# Altium PCB prism_mainboard.PcbDoc
Units mm, origin at the board's own origin, x right, y up, seen from the top; angles counter-clockwise.
Board outline 152.4 x 101.6 mm, 22 copper layers (F.Cu, F.Mask, B.Cu, B.Mask, In1.Cu, F.SilkS, In2.Cu, B.SilkS, In3.Cu, F.Adhes, In4.Cu, B.Adhes, F.Paste, B.Paste, Dwgs.User, Cmts.User, Eco1.User, Eco2.User, Edge.Cuts, Margin, B.CrtYd, F.CrtYd); 76 components, 0 nets, 1138 pads, 0 vias.
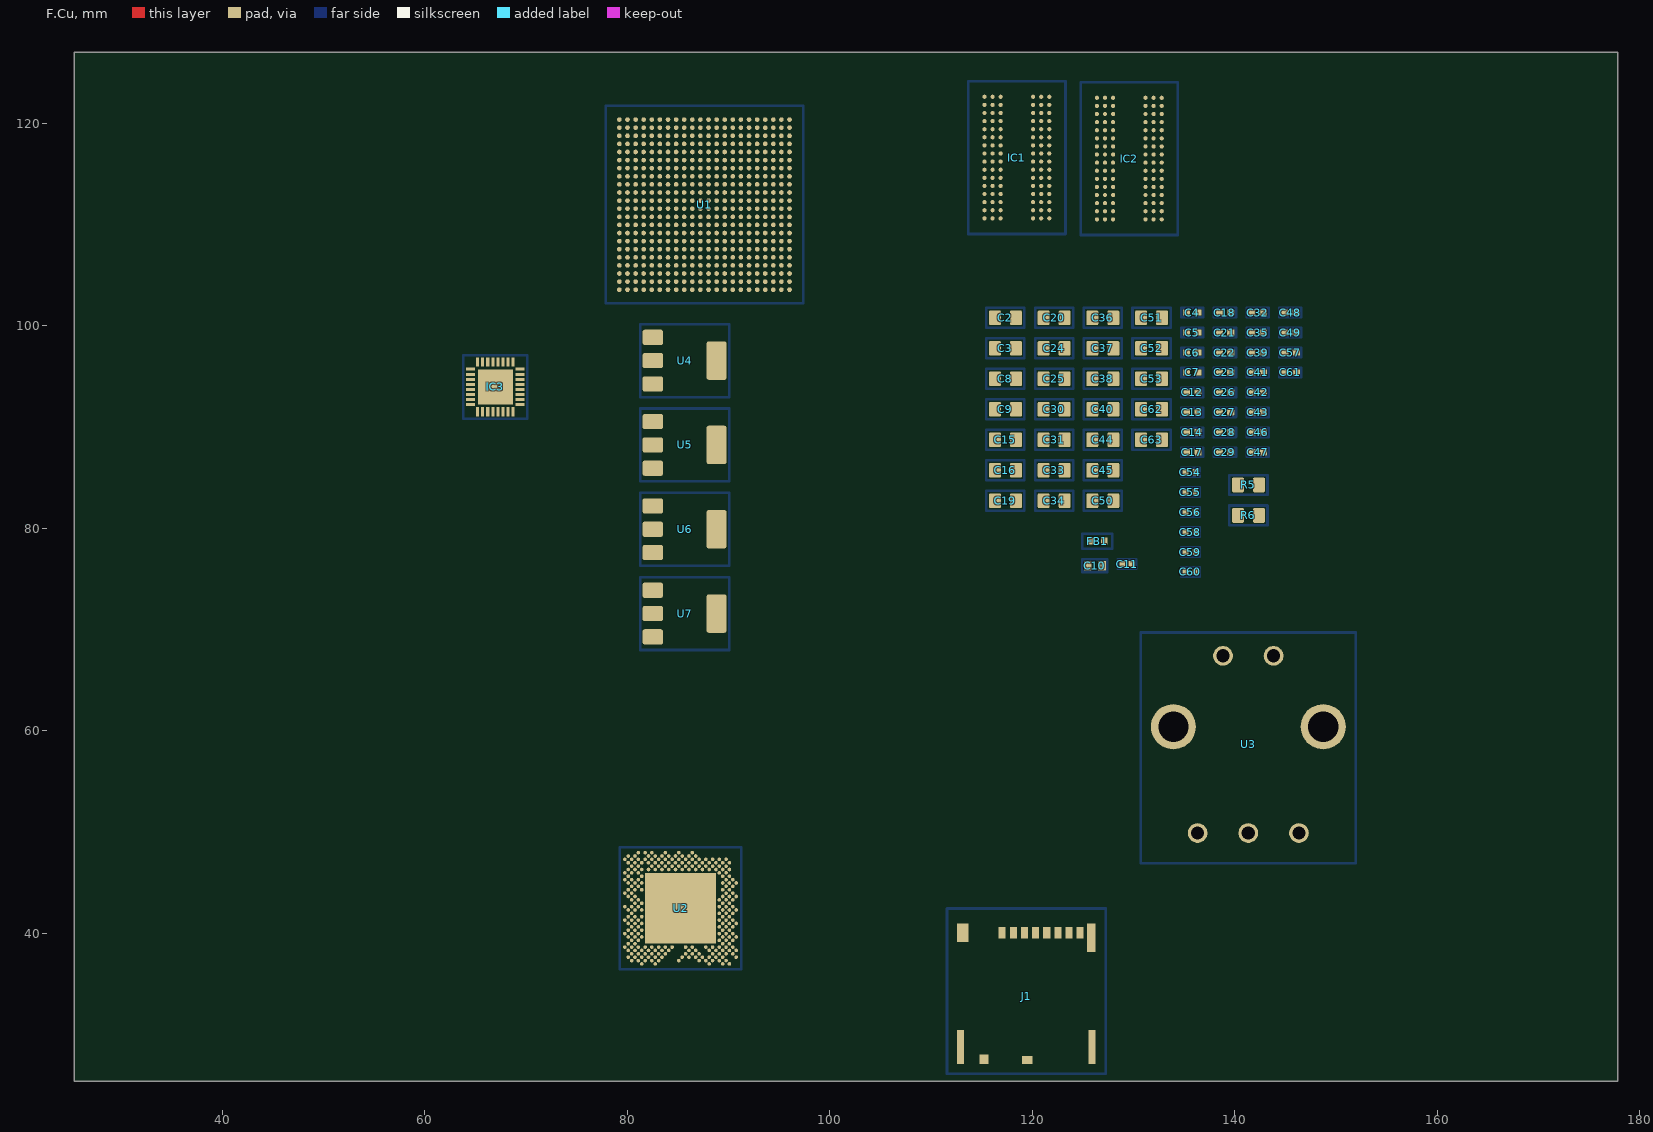
[diagram p0: F.Cu view]
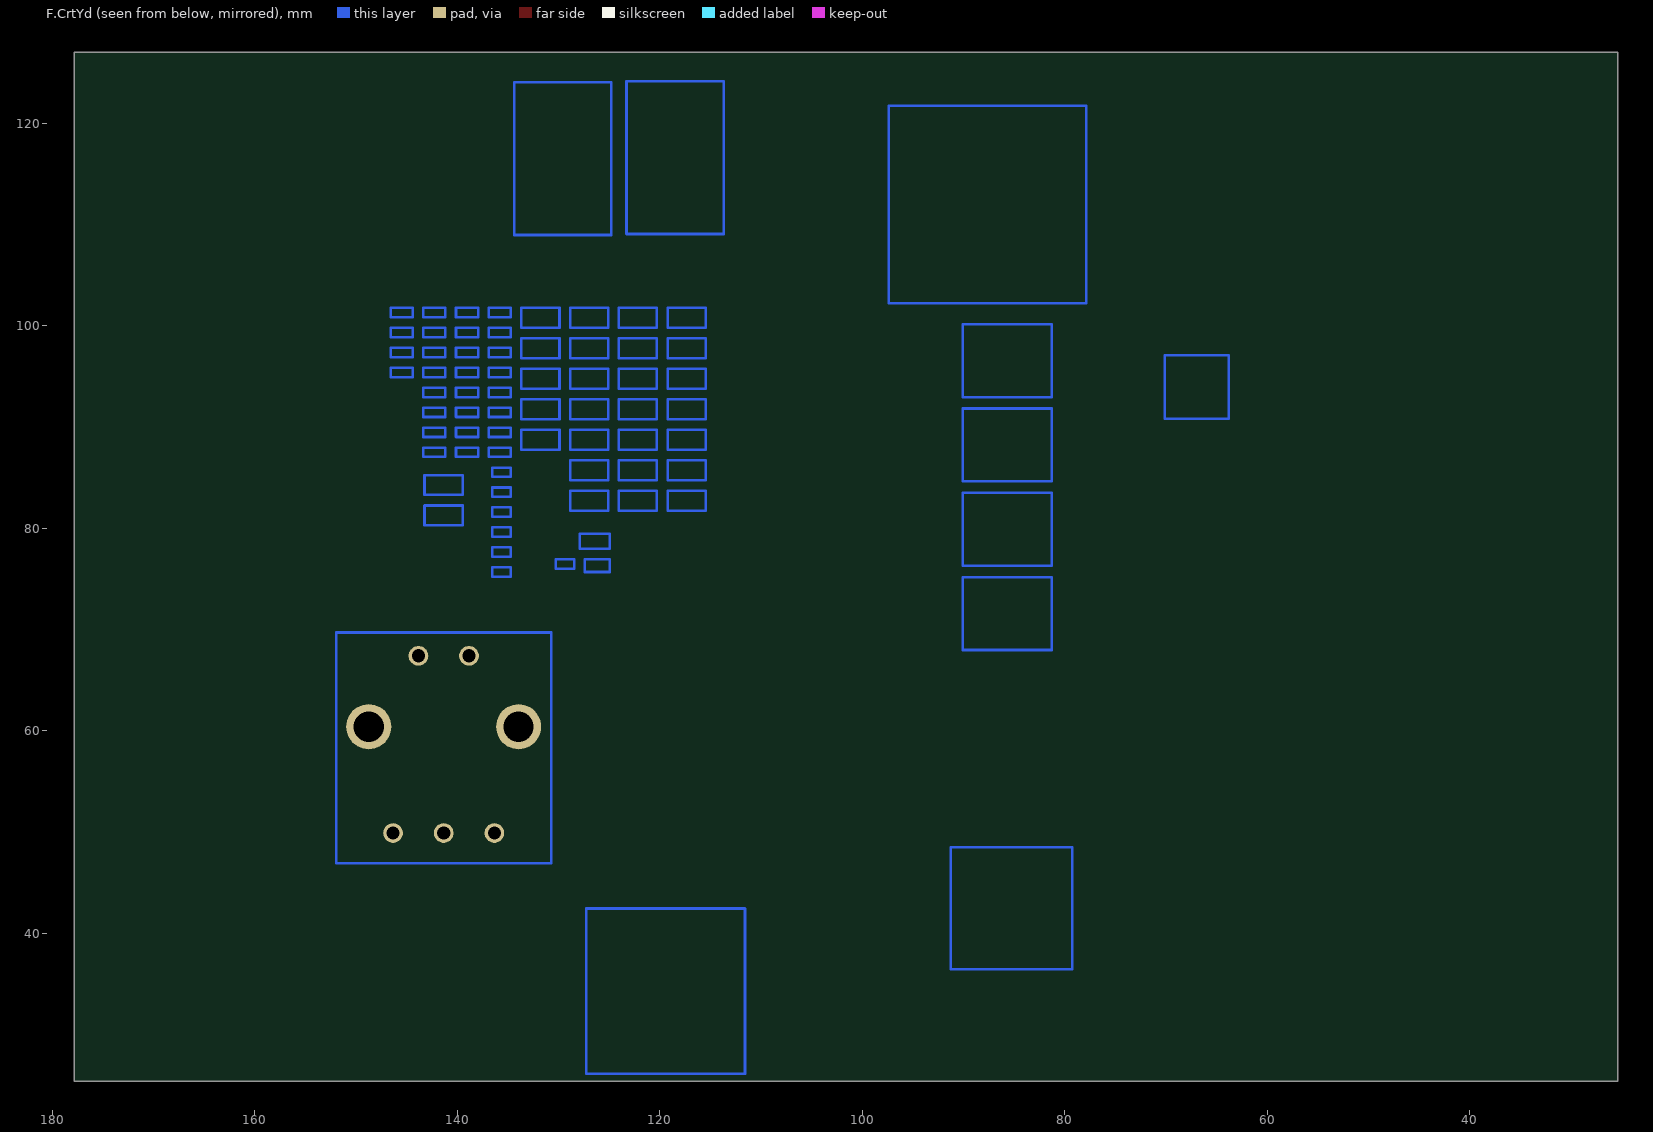
[diagram p1: F.CrtYd view, seen from below]
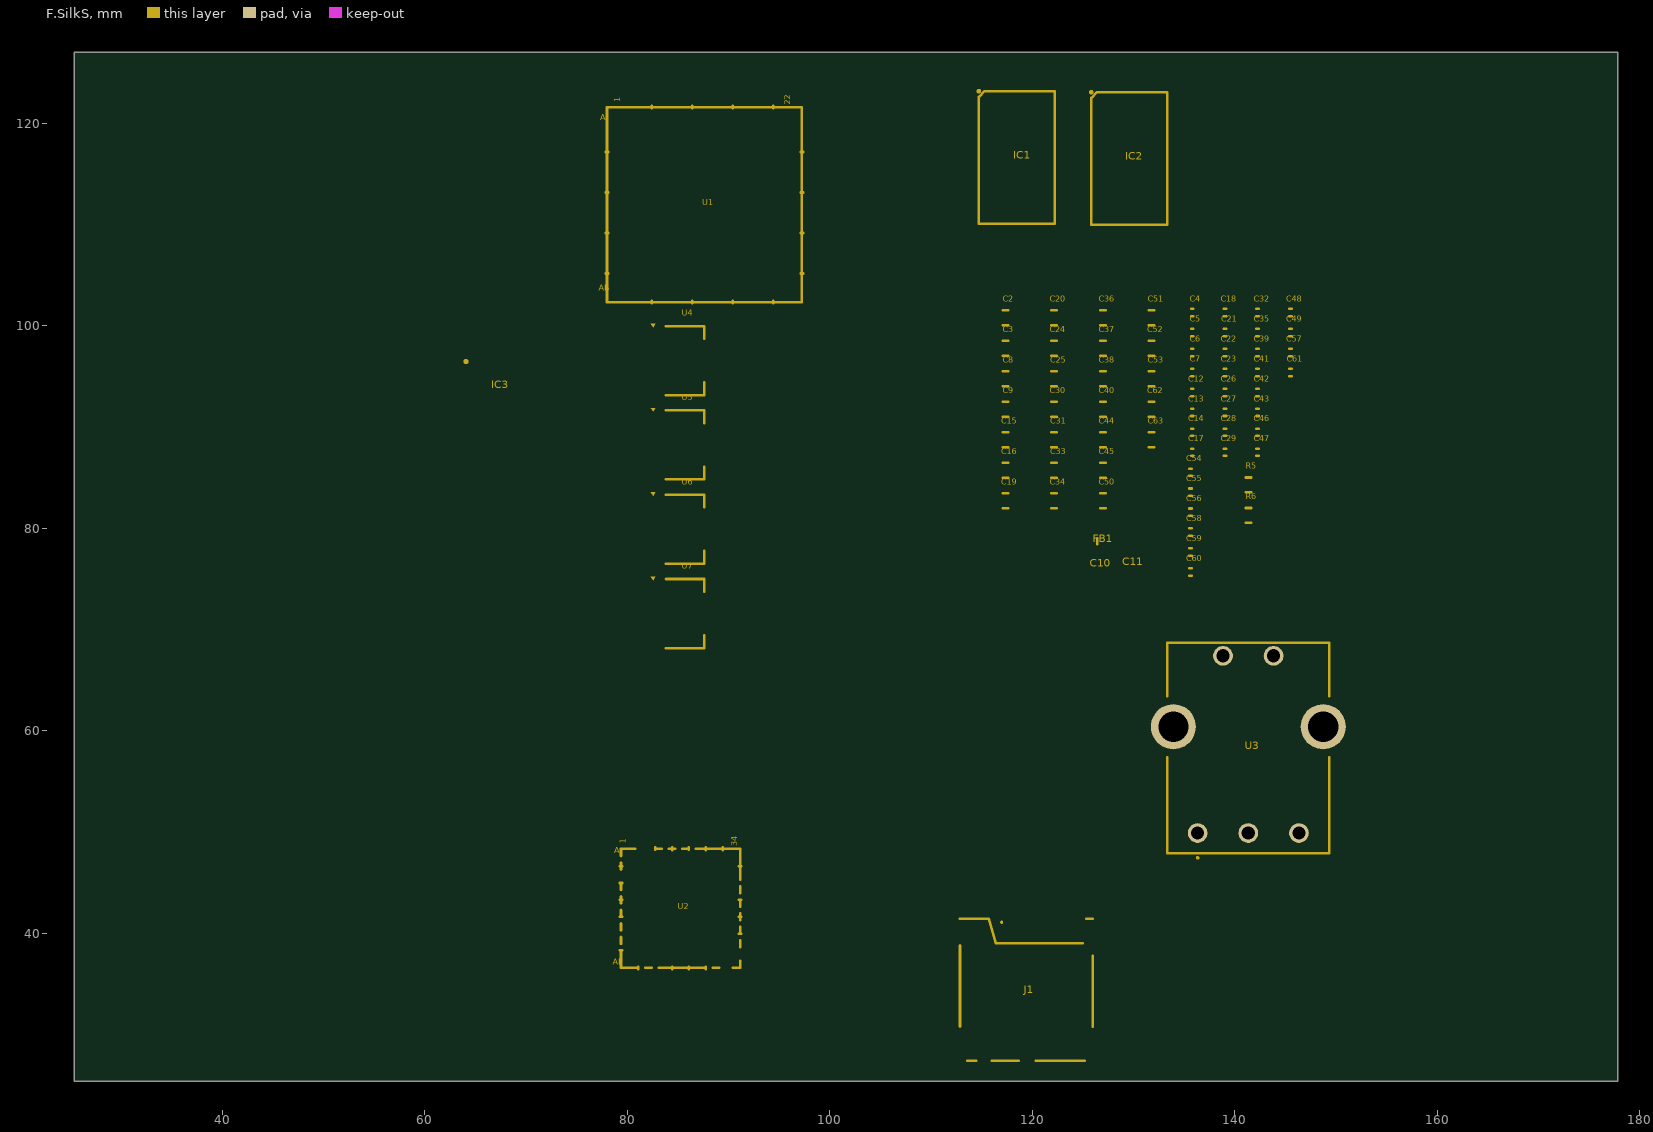
[diagram p2: F.SilkS]
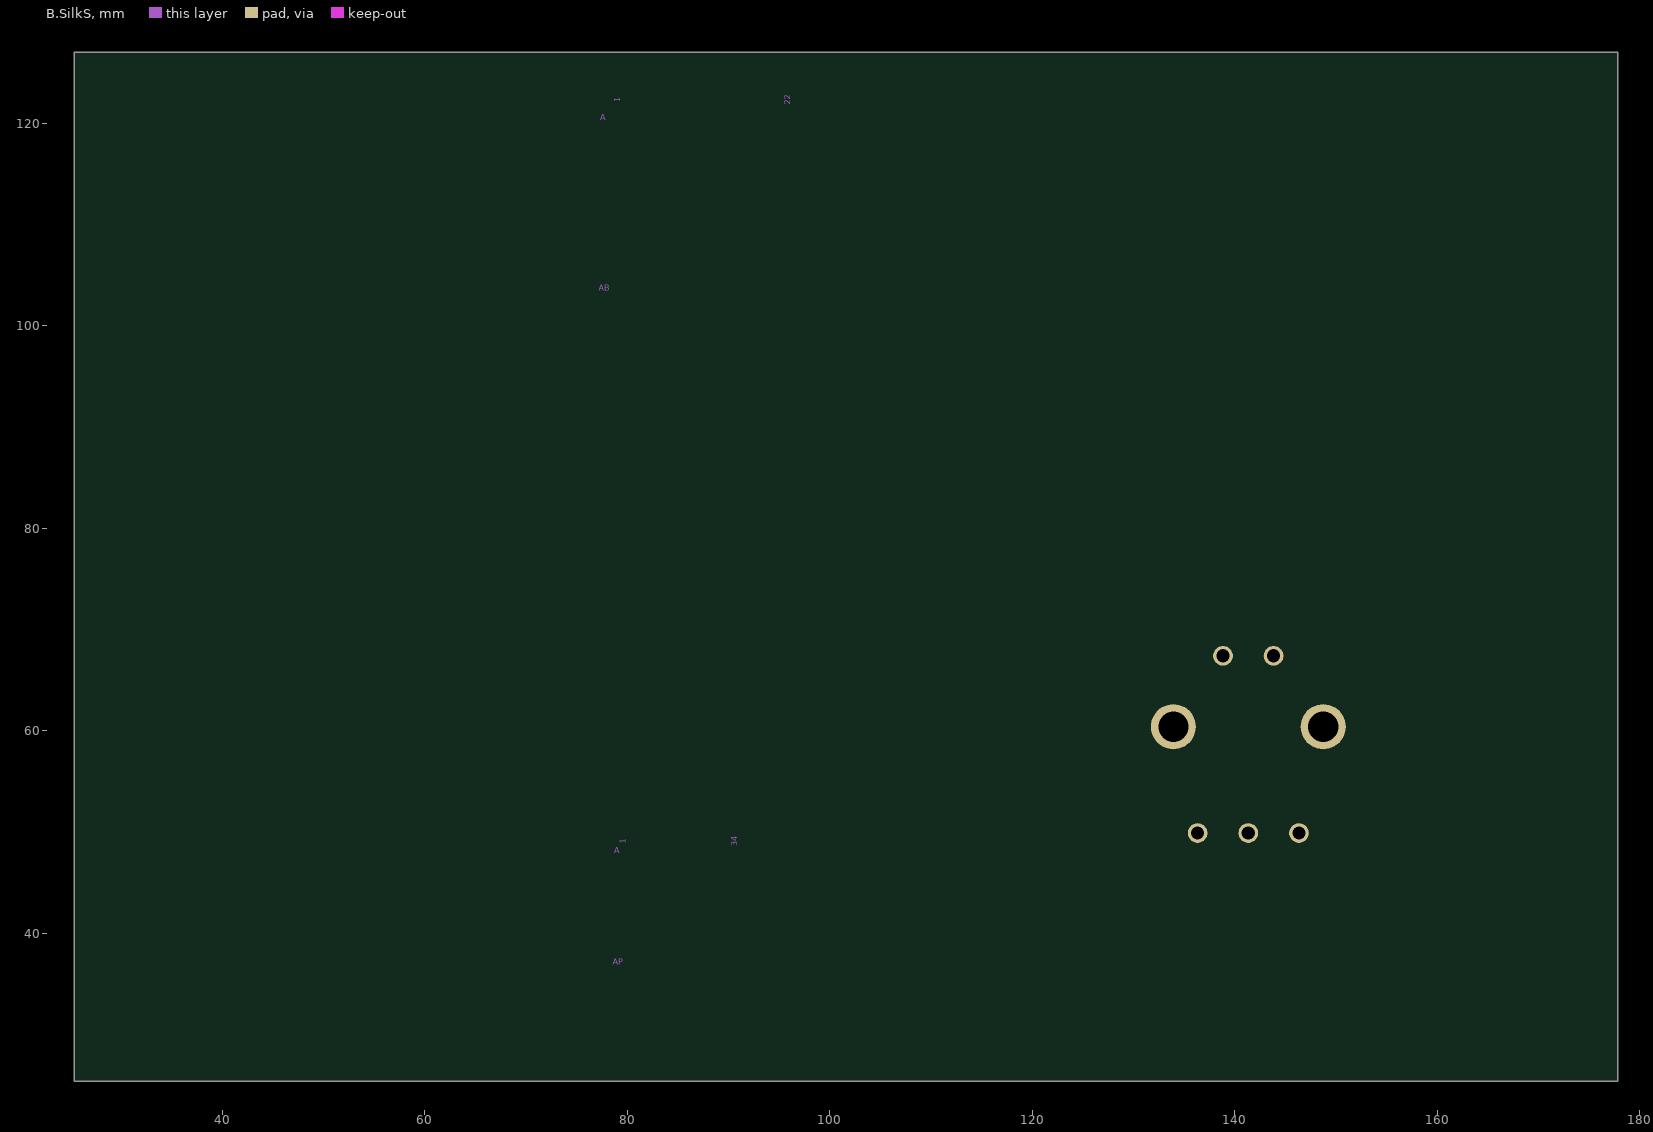
[diagram p3: B.SilkS]
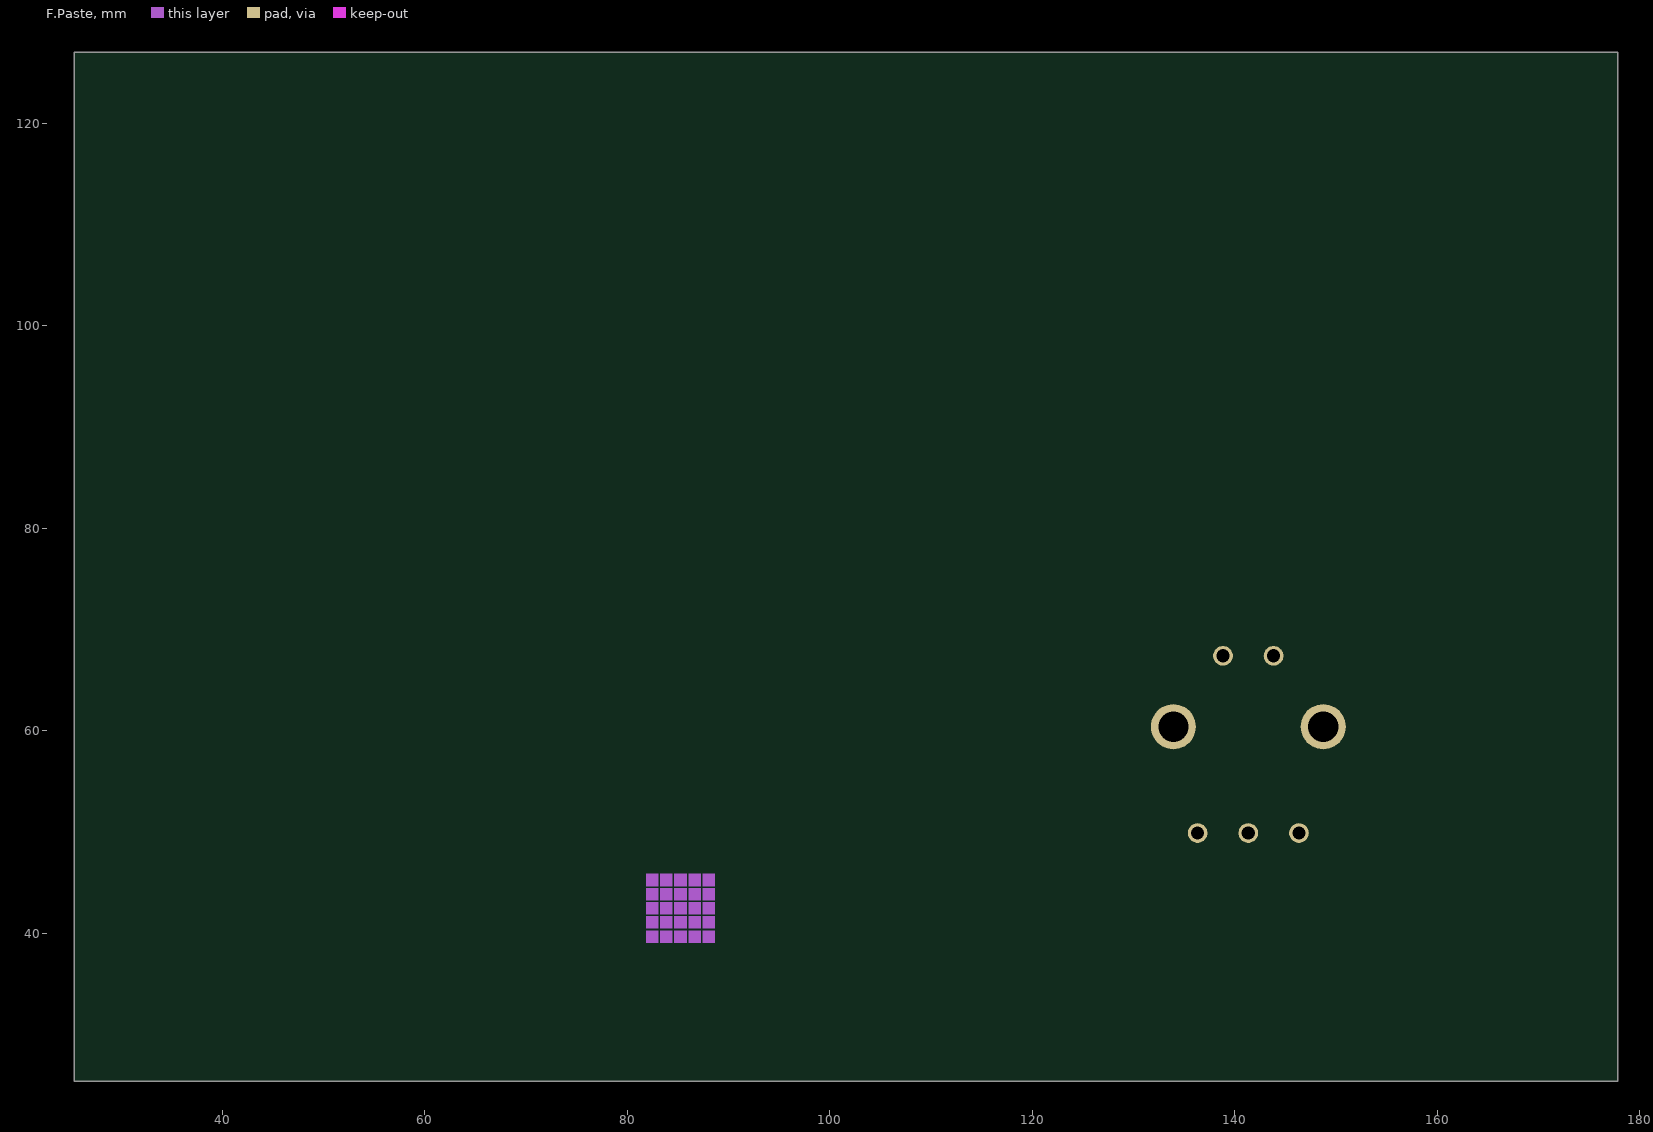
[diagram p4: F.Paste]
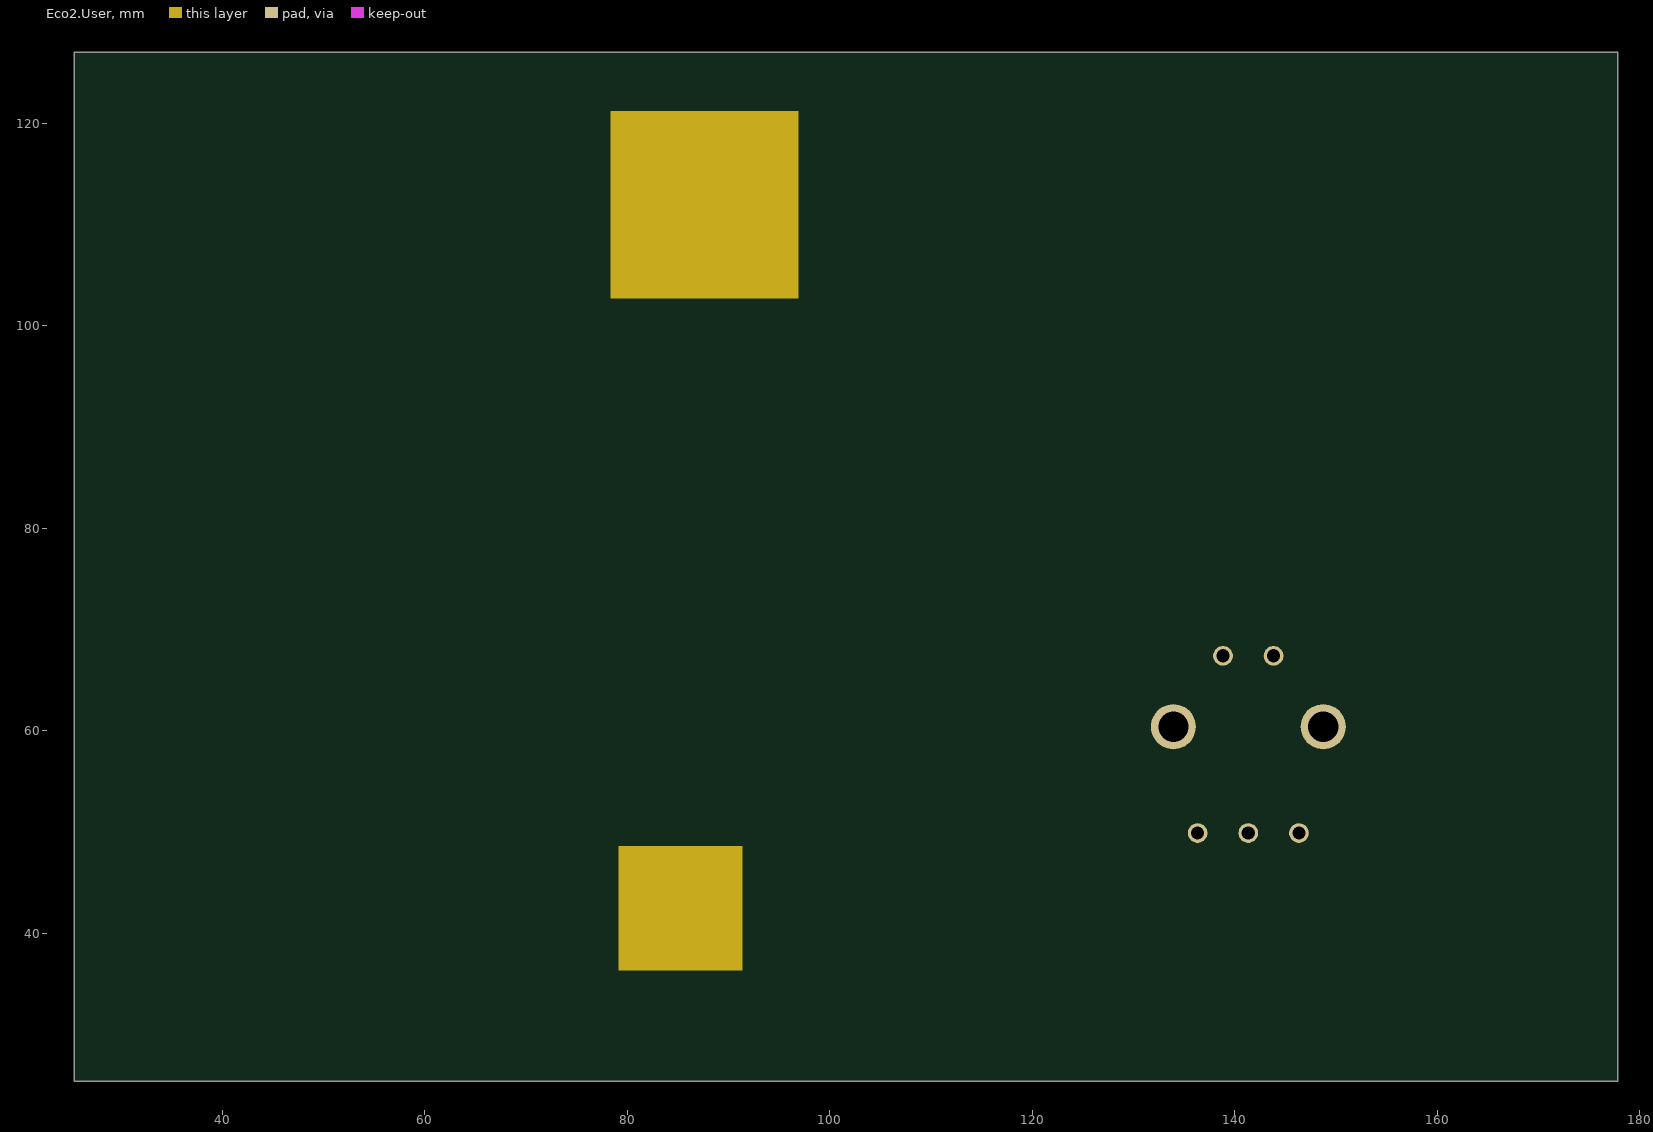
[diagram p5: Eco2.User]
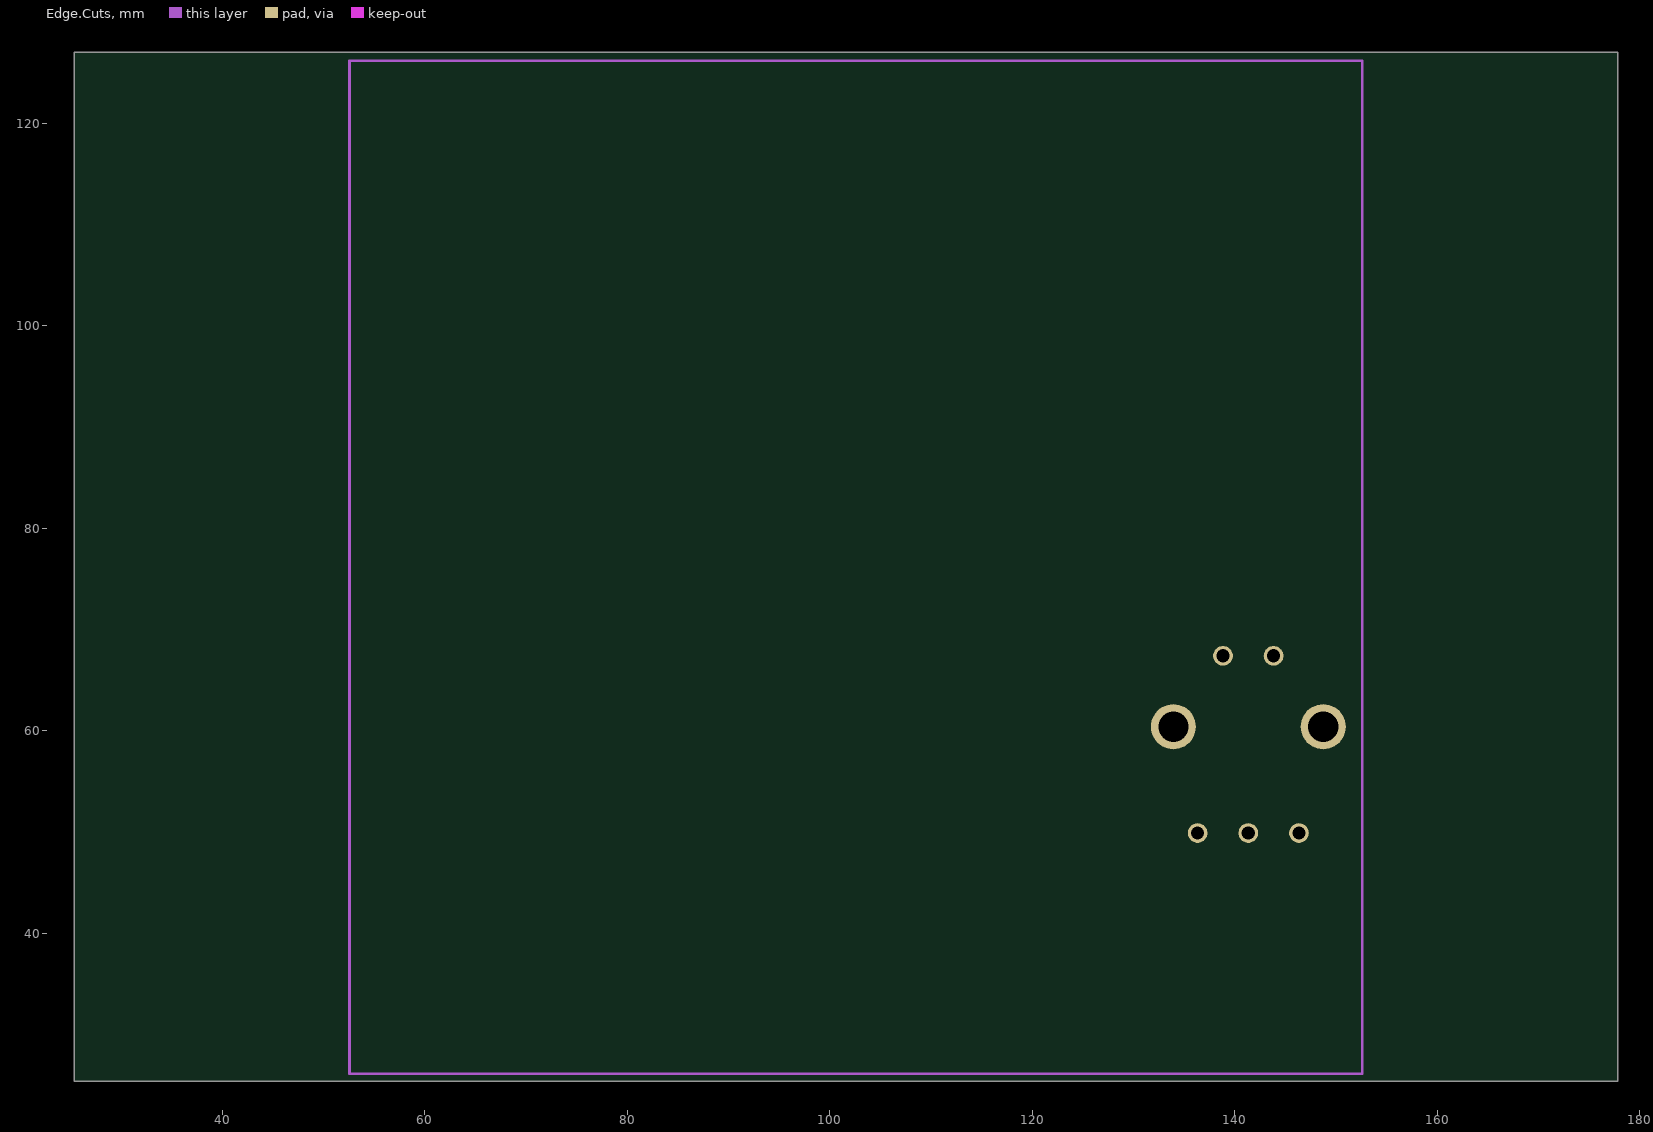
[diagram p6: Edge.Cuts]

## Layer stack, top to bottom
Top Solder: solder mask 0.0102, Solder Resist, Dk 3.5
F.Cu: signal copper 0.0356
Dielectric 1: dielectric 0.32, FR-4, Dk 4.8
F.Mask: signal copper 0.0356
Dielectric2: dielectric 0.32, FR-4, Dk 4.8
B.Cu: signal copper 0.0356
Dielectric3: dielectric 0.32, FR-4, Dk 4.8
B.Mask: signal copper 0.0356
Dielectric4: dielectric 0.32, FR-4, Dk 4.8
In1.Cu: signal copper 0.0356
Dielectric5: dielectric 0.32, FR-4, Dk 4.8
F.SilkS: signal copper 0.0356
Dielectric6: dielectric 0.32, FR-4, Dk 4.8
In2.Cu: signal copper 0.0356
Dielectric7: dielectric 0.32, FR-4, Dk 4.8
B.SilkS: signal copper 0.0356
Dielectric8: dielectric 0.32, FR-4, Dk 4.8
In3.Cu: signal copper 0.0356
Dielectric9: dielectric 0.32, FR-4, Dk 4.8
F.Adhes: signal copper 0.0356
Dielectric10: dielectric 0.32, FR-4, Dk 4.8
In4.Cu: signal copper 0.0356
Dielectric11: dielectric 0.32, FR-4, Dk 4.8
B.Adhes: signal copper 0.0356
Dielectric12: dielectric 0.32, FR-4, Dk 4.8
F.Paste: signal copper 0.0356
Dielectric13: dielectric 0.32, FR-4, Dk 4.8
B.Paste: signal copper 0.0356
Dielectric14: dielectric 0.32, FR-4, Dk 4.8
Dwgs.User: signal copper 0.0356
Dielectric15: dielectric 0.32, FR-4, Dk 4.8
Cmts.User: signal copper 0.0356
Dielectric16: dielectric 0.32, FR-4, Dk 4.8
Eco1.User: signal copper 0.0356
Dielectric17: dielectric 0.32, FR-4, Dk 4.8
Eco2.User: signal copper 0.0356
Dielectric18: dielectric 0.32, FR-4, Dk 4.8
Edge.Cuts: signal copper 0.0356
Dielectric19: dielectric 0.32, FR-4, Dk 4.8
Margin: signal copper 0.0356
Dielectric20: dielectric 0.32, FR-4, Dk 4.8
B.CrtYd: signal copper 0.0356
Dielectric21: dielectric 0.32, FR-4, Dk 4.8
F.CrtYd: signal copper 0.0356
Bottom Solder: solder mask 0.0102, Solder Resist, Dk 3.5

## Board outline
25.4,25.4 177.8,25.4 177.8,127 25.4,127

## Design rules (kind name [scope] priority, off if disabled: settings)
Clearance "Clearence 0.2_NetClass" [InNetClass('Default')] p1: gap=0.2 ignorepadtopadclearanceinfootprint=FALSE
MinimumSolderMaskSliver [All] p1: minsoldermaskwidth=0
PolygonConnect [All] p1: connectstyle=Direct reliefconductorwidth=0.254 reliefentries=4 polygonreliefangle="90 Angle" airgapwidth=0.254
RoutingVias [All] p1: holewidth=0.711 width=1.27 viastyle="Through Hole" minholewidth=0.711 minwidth=1.27 maxholewidth=0.711 maxwidth=1.27
SilkToSilkClearance [All] p1: silktosilkclearance=0
SilkToSolderMaskClearance [IsPad] p1: minsilkscreentomaskgap=0 clearancetoexposedcopper=TRUE
SolderMaskExpansion [All] p1: expansion=0 istentingtop=FALSE
Width [All] p1: maxlimit=10 minlimit=0.254 preferedwidth=0.254 toplayer_maxwidth=0.254 midlayer1_maxwidth=0.254 midlayer2_maxwidth=0.254 midlayer3_maxwidth=0.254 midlayer4_maxwidth=0.254 midlayer5_prefwidth=0.2 midlayer6_maxwidth=0.254 midlayer7_prefwidth=0.2 midlayer8_maxwidth=0.254 midlayer9_maxwidth=0.254 midlayer10_maxwidth=0.254 midlayer11_maxwidth=0.254 midlayer13_prefwidth=0.2 midlayer15_maxwidth=0.254 midlayer17_maxwidth=0.254 midlayer19_maxwidth=0.254 midlayer21_maxwidth=0.254 midlayer23_prefwidth=0.2 midlayer25_prefwidth=0.2 midlayer27_maxwidth=0.254 midlayer29_maxwidth=0.254 bottomlayer_prefwidth=0.2 minimp=50.000000 maximp=50.000000 favimp=50.000000
27 further rules are at their usual default settings.

## Components (designator, comment, footprint, x,y, rotation, side; value= is the part's Value field where it differs from the comment)
C2 "Comment" C_0805_2012Metric_Pad1.18x1.45mm_HandSolder 117.342,100.776 r0 top value=4.7uF
C3 "Comment" C_0805_2012Metric_Pad1.18x1.45mm_HandSolder 117.342,97.766 r0 top value=4.7uF
C4 "Comment" C_0402_1005Metric_Pad0.74x0.62mm_HandSolder 135.791,101.296 r0 top value=470nF
C5 "Comment" C_0402_1005Metric_Pad0.74x0.62mm_HandSolder 135.791,99.326 r0 top value=470nF
C6 "Comment" C_0402_1005Metric_Pad0.74x0.62mm_HandSolder 135.791,97.356 r0 top value=470nF
C7 "Comment" C_0402_1005Metric_Pad0.74x0.62mm_HandSolder 135.791,95.386 r0 top value=470nF
C8 "Comment" C_0805_2012Metric_Pad1.18x1.45mm_HandSolder 117.342,94.756 r0 top value=100uF
C9 "Comment" C_0805_2012Metric_Pad1.18x1.45mm_HandSolder 117.342,91.746 r0 top value=4.7uF
C10 "Comment" CAPC1608X90N 126.174,76.306 r0 top value=GRM188R60G106ME47D
C11 "Comment" CAPC1005X70N 129.359,76.466 r0 top value=GRM155R60J474KE19D
C12 "Comment" C_0402_1005Metric_Pad0.74x0.62mm_HandSolder 135.791,93.416 r0 top value=470nF
C13 "Comment" C_0402_1005Metric_Pad0.74x0.62mm_HandSolder 135.791,91.446 r0 top value=470nF
C14 "Comment" C_0402_1005Metric_Pad0.74x0.62mm_HandSolder 135.791,89.476 r0 top value=470nF
C15 "Comment" C_0805_2012Metric_Pad1.18x1.45mm_HandSolder 117.342,88.736 r0 top value=47uF
C16 "Comment" C_0805_2012Metric_Pad1.18x1.45mm_HandSolder 117.342,85.726 r0 top value=4.7uF
C17 "Comment" C_0402_1005Metric_Pad0.74x0.62mm_HandSolder 135.791,87.506 r0 top value=470nF
C18 "Comment" C_0402_1005Metric_Pad0.74x0.62mm_HandSolder 139.021,101.296 r0 top value=470nF
C19 "Comment" C_0805_2012Metric_Pad1.18x1.45mm_HandSolder 117.342,82.716 r0 top value=47uF
C20 "Comment" C_0805_2012Metric_Pad1.18x1.45mm_HandSolder 122.152,100.776 r0 top value=4.7uF
C21 "Comment" C_0402_1005Metric_Pad0.74x0.62mm_HandSolder 139.021,99.326 r0 top value=470nF
C22 "Comment" C_0402_1005Metric_Pad0.74x0.62mm_HandSolder 139.021,97.356 r0 top value=470nF
C23 "Comment" C_0402_1005Metric_Pad0.74x0.62mm_HandSolder 139.021,95.386 r0 top value=470nF
C24 "Comment" C_0805_2012Metric_Pad1.18x1.45mm_HandSolder 122.152,97.766 r0 top value=100uF
C25 "Comment" C_0805_2012Metric_Pad1.18x1.45mm_HandSolder 122.152,94.756 r0 top value=4.7uF
C26 "Comment" C_0402_1005Metric_Pad0.74x0.62mm_HandSolder 139.021,93.416 r0 top value=470nF
C27 "Comment" C_0402_1005Metric_Pad0.74x0.62mm_HandSolder 139.021,91.446 r0 top value=470nF
C28 "Comment" C_0402_1005Metric_Pad0.74x0.62mm_HandSolder 139.021,89.476 r0 top value=470nF
C29 "Comment" C_0402_1005Metric_Pad0.74x0.62mm_HandSolder 139.021,87.506 r0 top value=470nF
C30 "Comment" C_0805_2012Metric_Pad1.18x1.45mm_HandSolder 122.152,91.746 r0 top value=100uF
C31 "Comment" C_0805_2012Metric_Pad1.18x1.45mm_HandSolder 122.152,88.736 r0 top value=4.7uF
C32 "Comment" C_0402_1005Metric_Pad0.74x0.62mm_HandSolder 142.252,101.296 r0 top value=470nF
C33 "Comment" C_0805_2012Metric_Pad1.18x1.45mm_HandSolder 122.152,85.726 r0 top value=100uF
C34 "Comment" C_0805_2012Metric_Pad1.18x1.45mm_HandSolder 122.152,82.716 r0 top value=4.7uF
C35 "Comment" C_0402_1005Metric_Pad0.74x0.62mm_HandSolder 142.252,99.326 r0 top value=470nF
C36 "Comment" C_0805_2012Metric_Pad1.18x1.45mm_HandSolder 126.961,100.776 r0 top value=47uF
C37 "Comment" C_0805_2012Metric_Pad1.18x1.45mm_HandSolder 126.961,97.766 r0 top value=47uF
C38 "Comment" C_0805_2012Metric_Pad1.18x1.45mm_HandSolder 126.961,94.756 r0 top value=4.7uF
C39 "Comment" C_0402_1005Metric_Pad0.74x0.62mm_HandSolder 142.252,97.356 r0 top value=470nF
C40 "Comment" C_0805_2012Metric_Pad1.18x1.45mm_HandSolder 126.961,91.746 r0 top value=4.7uF
C41 "Comment" C_0402_1005Metric_Pad0.74x0.62mm_HandSolder 142.252,95.386 r0 top value=470nF
C42 "Comment" C_0402_1005Metric_Pad0.74x0.62mm_HandSolder 142.252,93.416 r0 top value=470nF
C43 "Comment" C_0402_1005Metric_Pad0.74x0.62mm_HandSolder 142.252,91.446 r0 top value=470nF
C44 "Comment" C_0805_2012Metric_Pad1.18x1.45mm_HandSolder 126.961,88.736 r0 top value=4.7uF
C45 "Comment" C_0805_2012Metric_Pad1.18x1.45mm_HandSolder 126.961,85.726 r0 top value=4.7uF
C46 "Comment" C_0402_1005Metric_Pad0.74x0.62mm_HandSolder 142.252,89.476 r0 top value=470nF
C47 "Comment" C_0402_1005Metric_Pad0.74x0.62mm_HandSolder 142.252,87.506 r0 top value=470nF
C48 "Comment" C_0402_1005Metric_Pad0.74x0.62mm_HandSolder 145.481,101.296 r0 top value=470nF
C49 "Comment" C_0402_1005Metric_Pad0.74x0.62mm_HandSolder 145.481,99.326 r0 top value=470nF
C50 "Comment" C_0805_2012Metric_Pad1.18x1.45mm_HandSolder 126.961,82.716 r0 top value=1uF
C51 "Comment" C_0805_2012Metric_Pad1.18x1.45mm_HandSolder 131.771,100.776 r0 top value=1uF
C52 "Comment" C_0805_2012Metric_Pad1.18x1.45mm_HandSolder 131.771,97.766 r0 top value=1uF
C53 "Comment" C_0805_2012Metric_Pad1.18x1.45mm_HandSolder 131.771,94.756 r0 top value=1uF
C54 "Comment" C_0402_1005Metric 135.611,85.536 r0 top value=0.1uF
C55 "Comment" C_0402_1005Metric 135.611,83.566 r0 top value=0.1uF
C56 "Comment" C_0402_1005Metric 135.611,81.596 r0 top value=10nF
C57 "Comment" C_0402_1005Metric_Pad0.74x0.62mm_HandSolder 145.481,97.356 r0 top value=10nF
C58 "Comment" C_0402_1005Metric 135.611,79.626 r0 top value=0.1uF
C59 "Comment" C_0402_1005Metric 135.611,77.656 r0 top value=0.1uF
C60 "Comment" C_0402_1005Metric 135.611,75.686 r0 top value=0.1uF
C61 "Comment" C_0402_1005Metric_Pad0.74x0.62mm_HandSolder 145.481,95.386 r0 top value=4.7uF
C62 "Comment" C_0805_2012Metric_Pad1.18x1.45mm_HandSolder 131.771,91.746 r0 top value=47uF
C63 "Comment" C_0805_2012Metric_Pad1.18x1.45mm_HandSolder 131.771,88.736 r0 top value=47uF
FB1 "Comment" BLM18EG101TH1D 126.424,78.726 r0 top value=BLM18SG121TN1D
IC1 "Comment" BGA96C80P9X16_750X1300X100 118.474,116.606 r0 top value=KTDM4G3C618BGIEAT
IC2 "Comment" BGA96C80P9X16_750X1300X100 129.574,116.506 r0 top value=KTDM4G3C618BGIEAT
IC3 "Comment" QFN50P500X500X100-33N-D 66.974,93.956 r0 top value=USB3320C-EZK
J1 "Comment" 5033981892 112.854,41.456 r0 top value=503398-1892
R5 "Comment" C_0805_2012Metric_Pad1.18x1.45mm_HandSolder 141.342,84.276 r0 top value=20k
R6 "Comment" C_0805_2012Metric_Pad1.18x1.45mm_HandSolder 141.342,81.266 r0 top value=20k
U1 "Comment" CLG485_XIL 87.624,111.956 r0 top value=XC7Z015-2CLG485I
U2 "Comment" AQFN261_11P5X11P5_LIM 85.261,42.477 r0 top value=LMS7002M
U3 "Comment" PEC164120FS0012 136.324,49.906 r0 top value=PEC16-4220F-S0024
U4 "Comment" SOT-223-3_TabPin2 85.674,96.556 r0 top value=AMS1117-1.8
U5 "Comment" SOT-223-3_TabPin2 85.674,88.231 r0 top value=AMS1117-1.8
U6 "Comment" SOT-223-3_TabPin2 85.674,79.906 r0 top value=AMS1117-1.8
U7 "Comment" SOT-223-3_TabPin2 85.674,71.581 r0 top value=AMS1117-1.8

## Footprints (in the part's own frame and the unit in brackets; to place one, negate y for a bottom-side part, rotate by r counter-clockwise, add the part's x,y. Pads: shape width x height; smd on the part's side, far side on the other; paste and mask are expansions set on the pad)
5033981892 [mm]
  rect 0.7x1.1 smd paste-1.1 mask-1.1: 1(4.17,-1.4) 2(5.27,-1.4) 3(6.37,-1.4) 4(7.47,-1.4) 5(8.57,-1.4) 6(9.67,-1.4) 7(10.77,-1.4) 8(11.87,-1.4)
  rect 0.9x0.93 smd paste-0.93 mask-0.93: 9(2.38,-13.865)
  rect 1.05x0.78 smd paste-1.05 mask-1.05: 10(6.645,-13.94)
  rect 0.7x3.33 smd paste-3.33 mask-3.33: 11(13.03,-12.665) 14(0.07,-12.665)
  rect 0.86x2.8 smd paste-2.8 mask-2.8: 12(12.95,-1.9)
  rect 1.14x1.83 smd paste-1.83 mask-1.83: 13(0.29,-1.415)
  F.SilkS lines w0.254: 0,-10.648 0,-2.65 ; 0,0 2.849,0 3.554,-2.42 12.109,-2.42 ; 0.74,-14.05 1.6,-14.05 ; 3.15,-14.05 5.8,-14.05 ; 7.5,-14.05 12.3,-14.05 ; 12.474,0 13.1,0 ; 13.1,-10.65 13.1,-3.65 ; 4.089,-0.356 ccw(c4.116,-0.356) 4.143,-0.356 ccw(c4.116,-0.356) 4.089,-0.356
  F.CrtYd lines w0.254: -1.28,-15.33 14.38,-15.33 14.38,1 -1.28,1 -1.28,-15.33
AQFN261_11P5X11P5_LIM [mil]
  rect 275x275 smd paste-275 mask-275: 262(0,0)
  round 14 smd paste-14 mask-14: A5(-163.88,216.32) A7(-137.66,216.32) A9(-111.44,216.32) A13(-59,216.32) A17(-6.56,216.32) A21(45.89,216.32) AA1(-216.32,-45.89) AA3(-190.1,-45.89) AA5(-163.88,-45.89) AA29(150.77,-45.89) AA31(176.99,-45.89) AA33(203.21,-45.89) AB2(-203.21,-59) AB4(-176.99,-59) AB6(-150.77,-59) AB30(163.88,-59) AB32(190.1,-59) AB34(216.32,-59) AC3(-190.1,-72.11) AC5(-163.88,-72.11) AC29(150.77,-72.11) AC31(176.99,-72.11) AC33(203.21,-72.11) AD2(-203.21,-85.22) AD4(-176.99,-85.22) AD6(-150.77,-85.22) AD30(163.88,-85.22) AD32(190.1,-85.22) AE1(-216.32,-98.33) AE3(-190.1,-98.33) AE5(-163.88,-98.33) AE29(150.77,-98.33) AE31(176.99,-98.33) AE33(203.21,-98.33) AF2(-203.21,-111.44) AF4(-176.99,-111.44) AF6(-150.77,-111.44) AF30(163.88,-111.44) AF32(190.1,-111.44) AF34(216.32,-111.44) AG3(-190.1,-124.55) AG5(-163.88,-124.55) AG29(150.77,-124.55) AG31(176.99,-124.55) AG33(203.21,-124.55) AH2(-203.21,-137.66) AH4(-176.99,-137.66) AH30(163.88,-137.66) AH32(190.1,-137.66) AJ1(-216.32,-150.77) AJ3(-190.1,-150.77) AJ5(-163.88,-150.77) AJ7(-137.66,-150.77) AJ9(-111.44,-150.77) AJ11(-85.22,-150.77) AJ13(-59,-150.77) AJ15(-32.78,-150.77) AJ19(19.67,-150.77) AJ21(45.89,-150.77) AJ25(98.33,-150.77) AJ27(124.55,-150.77) AJ29(150.77,-150.77) AJ31(176.99,-150.77) AJ33(203.21,-150.77) AK2(-203.21,-163.88) AK4(-176.99,-163.88) AK6(-150.77,-163.88) AK8(-124.55,-163.88) AK10(-98.33,-163.88) AK12(-72.11,-163.88) AK14(-45.89,-163.88) AK20(32.78,-163.88) AK22(59,-163.88) AK26(111.44,-163.88) AK28(137.66,-163.88) AK30(163.88,-163.88) AK32(190.1,-163.88) AK34(216.32,-163.88) AL3(-190.1,-176.99) AL5(-163.88,-176.99) AL7(-137.66,-176.99) AL9(-111.44,-176.99) AL11(-85.22,-176.99) AL13(-59,-176.99) AL19(19.67,-176.99) AL21(45.89,-176.99) AL23(72.11,-176.99) AL27(124.55,-176.99) AL29(150.77,-176.99) AL31(176.99,-176.99) AL33(203.21,-176.99) AM2(-203.21,-190.1) AM4(-176.99,-190.1) AM6(-150.77,-190.1) AM8(-124.55,-190.1) AM10(-98.33,-190.1) AM12(-72.11,-190.1) AM18(6.56,-190.1) AM20(32.78,-190.1) AM22(59,-190.1) AM24(85.22,-190.1) AM26(111.44,-190.1) AM28(137.66,-190.1) AM30(163.88,-190.1) AM34(216.32,-190.1) AN3(-190.1,-203.21) AN5(-163.88,-203.21) AN7(-137.66,-203.21) AN9(-111.44,-203.21) AN11(-85.22,-203.21) AN17(-6.56,-203.21) AN23(72.11,-203.21) AN25(98.33,-203.21) AN27(124.55,-203.21) AN29(150.77,-203.21) AN31(176.99,-203.21) AP6(-150.77,-216.32) AP10(-98.33,-216.32) AP26(111.44,-216.32) AP30(163.88,-216.32) AP32(190.1,-216.32) B2(-203.21,203.21) B4(-176.99,203.21) B8(-124.55,203.21) B10(-98.33,203.21) B12(-72.11,203.21) B14(-45.89,203.21) B16(-19.67,203.21) B18(6.56,203.21) B20(32.78,203.21) B22(59,203.21) C1(-216.32,190.1) C3(-190.1,190.1) C5(-163.88,190.1) C7(-137.66,190.1) C9(-111.44,190.1) C11(-85.22,190.1) C13(-59,190.1) C15(-32.78,190.1) C17(-6.56,190.1) C19(19.67,190.1) C21(45.89,190.1) C23(72.11,190.1) C25(98.33,190.1) C27(124.55,190.1) C29(150.77,190.1) C31(176.99,190.1) D2(-203.21,176.99) D4(-176.99,176.99) D6(-150.77,176.99) D8(-124.55,176.99) D10(-98.33,176.99) D12(-72.11,176.99) D14(-45.89,176.99) D16(-19.67,176.99) D18(6.56,176.99) D20(32.78,176.99) D22(59,176.99) D24(85.22,176.99) D26(111.44,176.99) D28(137.66,176.99) D30(163.88,176.99) D32(190.1,176.99) E3(-190.1,163.88) E5(-163.88,163.88) E9(-111.44,163.88) E11(-85.22,163.88) E13(-59,163.88) E15(-32.78,163.88) E17(-6.56,163.88) E19(19.67,163.88) E21(45.89,163.88) E23(72.11,163.88) E25(98.33,163.88) E27(124.55,163.88) E29(150.77,163.88) E31(176.99,163.88) F2(-203.21,150.77) F4(-176.99,150.77) F6(-150.77,150.77) F8(-124.55,150.77) F10(-98.33,150.77) F12(-72.11,150.77) F14(-45.89,150.77) F16(-19.67,150.77) F18(6.56,150.77) F20(32.78,150.77) F22(59,150.77) F24(85.22,150.77) F26(111.44,150.77) F28(137.66,150.77) F30(163.88,150.77) F32(190.1,150.77) G1(-216.32,137.66) G3(-190.1,137.66) G5(-163.88,137.66) G29(150.77,137.66) G31(176.99,137.66) H2(-203.21,124.55) H6(-150.77,124.55) H30(163.88,124.55) H32(190.1,124.55) J1(-216.32,111.44) J3(-190.1,111.44) J5(-163.88,111.44) J31(176.99,111.44) J33(203.21,111.44) K2(-203.21,98.33) K4(-176.99,98.33) K6(-150.77,98.33) K30(163.88,98.33) K32(190.1,98.33) K34(216.32,98.33) L3(-190.1,85.22) L5(-163.88,85.22) L31(176.99,85.22) L33(203.21,85.22) M2(-203.21,72.11) M4(-176.99,72.11) M6(-150.77,72.11) M30(163.88,72.11) M32(190.1,72.11) N1(-216.32,59) N3(-190.1,59) N31(176.99,59) N33(203.21,59) P2(-203.21,45.89) P4(-176.99,45.89) P30(163.88,45.89) P32(190.1,45.89) P34(216.32,45.89) R3(-190.1,32.78) R5(-163.88,32.78) R29(150.77,32.78) R31(176.99,32.78) R33(203.21,32.78) T4(-176.99,19.67) T6(-150.77,19.67) T30(163.88,19.67) T32(190.1,19.67) U1(-216.32,6.56) U3(-190.1,6.56) U5(-163.88,6.56) U29(150.77,6.56) U31(176.99,6.56) U33(203.21,6.56) V2(-203.21,-6.56) V4(-176.99,-6.56) V6(-150.77,-6.56) V30(163.88,-6.56) V32(190.1,-6.56) V34(216.32,-6.56) W3(-190.1,-19.67) W29(150.77,-19.67) W31(176.99,-19.67) W33(203.21,-19.67) Y2(-203.21,-32.78) Y4(-176.99,-32.78) Y6(-150.77,-32.78) Y30(163.88,-32.78) Y32(190.1,-32.78)
  F.SilkS lines w10: -236.5,-163.88 -227.3,-163.88 ; -236.5,-32.78 -227.3,-32.78 ; -236.5,32.78 -226.5,32.78 ; -236.5,98.33 -227.3,98.33 ; -236.5,163.88 -226.5,163.88 ; -231.5,-163.94 -231.5,-231.5 -163.94,-231.5 ; -231.5,-137.59 -231.5,-111.5 ; -231.5,-85.15 -231.5,-59.06 ; -231.5,-32.71 -231.5,-6.62 ; -231.5,19.73 -231.5,45.82 ; -231.5,72.17 -231.5,98.26 ; -231.5,150.83 -231.5,176.92 ; -231.5,203.27 -231.5,231.5 -177.05,231.5 ; -163.88,-236.5 -163.88,-227.3 ; -137.59,-231.5 -111.5,-231.5 ; -98.33,227.3 -98.33,236.5 ; -98.26,231.5 -72.17,231.5 ; -85.15,-231.5 98.26,-231.5 ; -45.82,231.5 -19.73,231.5 ; -32.78,-236.5 -32.78,-226.5 ; -32.78,226.5 -32.78,236.5 ; 6.62,231.5 32.71,231.5 ; 32.78,-236.5 32.78,-226.5 ; 32.78,227.3 32.78,236.5 ; 59.06,231.5 231.5,231.5 231.5,111.5 ; 98.33,-236.5 98.33,-227.3 ; 98.33,226.5 98.33,236.5 ; 124.61,-231.5 150.7,-231.5 ; 163.88,226.5 163.88,236.5 ; 203.27,-231.5 231.5,-231.5 231.5,-203.27 ; 226.5,-32.78 236.5,-32.78 ; 226.5,163.88 236.5,163.88 ; 227.3,-98.33 236.5,-98.33 ; 227.3,32.78 236.5,32.78 ; 231.5,-150.7 231.5,-124.61 ; 231.5,-98.26 231.5,-72.17 ; 231.5,-45.82 231.5,-19.73 ; 231.5,6.62 231.5,32.71 ; 231.5,59.06 231.5,85.15
  F.Paste region: 133.56,-133.56 86.44,-133.56 86.44,-86.44 133.56,-86.44
  F.Paste region: 133.56,-78.56 86.44,-78.56 86.44,-31.44 133.56,-31.44
  F.Paste region: 133.56,-23.56 86.44,-23.56 86.44,23.56 133.56,23.56
  F.Paste region: 133.56,31.44 86.44,31.44 86.44,78.56 133.56,78.56
  F.Paste region: 133.56,86.44 86.44,86.44 86.44,133.56 133.56,133.56
  F.Paste region: 78.56,-133.56 31.44,-133.56 31.44,-86.44 78.56,-86.44
  F.Paste region: 78.56,-78.56 31.44,-78.56 31.44,-31.44 78.56,-31.44
  F.Paste region: 78.56,-23.56 31.44,-23.56 31.44,23.56 78.56,23.56
  F.Paste region: 78.56,31.44 31.44,31.44 31.44,78.56 78.56,78.56
  F.Paste region: 78.56,86.44 31.44,86.44 31.44,133.56 78.56,133.56
  F.Paste region: 23.56,-133.56 -23.56,-133.56 -23.56,-86.44 23.56,-86.44
  F.Paste region: 23.56,-78.56 -23.56,-78.56 -23.56,-31.44 23.56,-31.44
  F.Paste region: 23.56,-23.56 -23.56,-23.56 -23.56,23.56 23.56,23.56
  F.Paste region: 23.56,31.44 -23.56,31.44 -23.56,78.56 23.56,78.56
  F.Paste region: 23.56,86.44 -23.56,86.44 -23.56,133.56 23.56,133.56
  F.Paste region: -31.44,-133.56 -78.56,-133.56 -78.56,-86.44 -31.44,-86.44
  F.Paste region: -31.44,-78.56 -78.56,-78.56 -78.56,-31.44 -31.44,-31.44
  F.Paste region: -31.44,-23.56 -78.56,-23.56 -78.56,23.56 -31.44,23.56
  F.Paste region: -31.44,31.44 -78.56,31.44 -78.56,78.56 -31.44,78.56
  F.Paste region: -31.44,86.44 -78.56,86.44 -78.56,133.56 -31.44,133.56
  F.Paste region: -86.44,-133.56 -133.56,-133.56 -133.56,-86.44 -86.44,-86.44
  F.Paste region: -86.44,-78.56 -133.56,-78.56 -133.56,-31.44 -86.44,-31.44
  F.Paste region: -86.44,-23.56 -133.56,-23.56 -133.56,23.56 -86.44,23.56
  F.Paste region: -86.44,31.44 -133.56,31.44 -133.56,78.56 -86.44,78.56
  F.Paste region: -86.44,86.44 -133.56,86.44 -133.56,133.56 -86.44,133.56
  Eco2.User region: 240.37,-240.37 -240.37,-240.37 -240.37,240.37 240.37,240.37
  F.CrtYd lines w10: -236.5,-236.5 236.5,-236.5 236.5,236.5 -236.5,236.5 -236.5,-236.5
BGA96C80P9X16_750X1300X100 [mm]
  round 0.41 smd paste-0.41 mask-0.41: A1(-3.2,6) A2(-2.4,6) A3(-1.6,6) A7(1.6,6) A8(2.4,6) A9(3.2,6) B1(-3.2,5.2) B2(-2.4,5.2) B3(-1.6,5.2) B7(1.6,5.2) B8(2.4,5.2) B9(3.2,5.2) C1(-3.2,4.4) C2(-2.4,4.4) C3(-1.6,4.4) C7(1.6,4.4) C8(2.4,4.4) C9(3.2,4.4) D1(-3.2,3.6) D2(-2.4,3.6) D3(-1.6,3.6) D7(1.6,3.6) D8(2.4,3.6) D9(3.2,3.6) E1(-3.2,2.8) E2(-2.4,2.8) E3(-1.6,2.8) E7(1.6,2.8) E8(2.4,2.8) E9(3.2,2.8) F1(-3.2,2) F2(-2.4,2) F3(-1.6,2) F7(1.6,2) F8(2.4,2) F9(3.2,2) G1(-3.2,1.2) G2(-2.4,1.2) G3(-1.6,1.2) G7(1.6,1.2) G8(2.4,1.2) G9(3.2,1.2) H1(-3.2,0.4) H2(-2.4,0.4) H3(-1.6,0.4) H7(1.6,0.4) H8(2.4,0.4) H9(3.2,0.4) J1(-3.2,-0.4) J2(-2.4,-0.4) J3(-1.6,-0.4) J7(1.6,-0.4) J8(2.4,-0.4) J9(3.2,-0.4) K1(-3.2,-1.2) K2(-2.4,-1.2) K3(-1.6,-1.2) K7(1.6,-1.2) K8(2.4,-1.2) K9(3.2,-1.2) L1(-3.2,-2) L2(-2.4,-2) L3(-1.6,-2) L7(1.6,-2) L8(2.4,-2) L9(3.2,-2) M1(-3.2,-2.8) M2(-2.4,-2.8) M3(-1.6,-2.8) M7(1.6,-2.8) M8(2.4,-2.8) M9(3.2,-2.8) N1(-3.2,-3.6) N2(-2.4,-3.6) N3(-1.6,-3.6) N7(1.6,-3.6) N8(2.4,-3.6) N9(3.2,-3.6) P1(-3.2,-4.4) P2(-2.4,-4.4) P3(-1.6,-4.4) P7(1.6,-4.4) P8(2.4,-4.4) P9(3.2,-4.4) R1(-3.2,-5.2) R2(-2.4,-5.2) R3(-1.6,-5.2) R7(1.6,-5.2) R8(2.4,-5.2) R9(3.2,-5.2) T1(-3.2,-6) T2(-2.4,-6) T3(-1.6,-6) T7(1.6,-6) T8(2.4,-6) T9(3.2,-6)
  F.SilkS circle w0.254: c-3.755,6.555 r0.1
  F.SilkS lines w0.254: -3.755,-6.555 3.755,-6.555 3.755,6.555 -3.2,6.555 -3.755,6 -3.755,-6.555
  F.CrtYd lines w0.254: -4.8,-7.55 4.8,-7.55 4.8,7.55 -4.8,7.55 -4.8,-7.55
BLM18EG101TH1D [mm]
  rect 0.65x0.7 smd paste-0.7 mask-0.7: 1(-0.675,0) 2(0.675,0)
  F.SilkS lines w0.254: 0,-0.3 0,0.3
  F.CrtYd lines w0.254: -1.475,-0.75 1.475,-0.75 1.475,0.75 -1.475,0.75 -1.475,-0.75
C_0402_1005Metric [mm]
  rrect25% 0.56x0.62 smd paste-0.62 mask-0.62: 1(-0.48,0) 2(0.48,0)
  F.SilkS lines w0.254: -0.108,-0.36 0.108,-0.36 ; -0.108,0.36 0.108,0.36
  F.CrtYd lines w0.254: -0.91,-0.46 0.91,-0.46 0.91,0.46 -0.91,0.46 -0.91,-0.46
C_0402_1005Metric_Pad0.74x0.62mm_HandSolder [mm]
  rrect25% 0.735x0.62 smd paste-0.735 mask-0.735: 1(-0.567,0) 2(0.567,0)
  F.SilkS lines w0.254: -0.116,-0.36 0.116,-0.36 ; -0.116,0.36 0.116,0.36
  F.CrtYd lines w0.254: -1.09,-0.46 1.09,-0.46 1.09,0.46 -1.09,0.46 -1.09,-0.46
C_0805_2012Metric_Pad1.18x1.45mm_HandSolder [mm]
  rrect21% 1.175x1.45 smd paste-1.45 mask-1.45: 1(-1.038,0) 2(1.038,0)
  F.SilkS lines w0.254: -0.261,-0.735 0.261,-0.735 ; -0.261,0.735 0.261,0.735
  F.CrtYd lines w0.254: -1.88,-0.98 1.88,-0.98 1.88,0.98 -1.88,0.98 -1.88,-0.98
CAPC1005X70N [mm]
  rect 0.6x0.62 smd paste-0.62 mask-0.62: 1(-0.46,0) 2(0.46,0)
  F.CrtYd lines w0.254: -0.91,-0.46 0.91,-0.46 0.91,0.46 -0.91,0.46 -0.91,-0.46
CAPC1608X90N [mm]
  rect 0.75x0.94 smd paste-0.94 mask-0.94: 1(-0.7,0) 2(0.7,0)
  F.CrtYd lines w0.254: -1.225,-0.62 1.225,-0.62 1.225,0.62 -1.225,0.62 -1.225,-0.62
CLG485_XIL [mm]
  round 0.457 smd paste-0.457 mask-0.457: A1(-8.4,8.4) A2(-7.6,8.4) A3(-6.8,8.4) A4(-6,8.4) A5(-5.2,8.4) A6(-4.4,8.4) A7(-3.6,8.4) A8(-2.8,8.4) A9(-2,8.4) A10(-1.2,8.4) A11(-0.4,8.4) A12(0.4,8.4) A13(1.2,8.4) A14(2,8.4) A15(2.8,8.4) A16(3.6,8.4) A17(4.4,8.4) A18(5.2,8.4) A19(6,8.4) A20(6.8,8.4) A21(7.6,8.4) A22(8.4,8.4) AA1(-8.4,-7.6) AA2(-7.6,-7.6) AA3(-6.8,-7.6) AA4(-6,-7.6) AA5(-5.2,-7.6) AA6(-4.4,-7.6) AA7(-3.6,-7.6) AA8(-2.8,-7.6) AA9(-2,-7.6) AA10(-1.2,-7.6) AA11(-0.4,-7.6) AA12(0.4,-7.6) AA13(1.2,-7.6) AA14(2,-7.6) AA15(2.8,-7.6) AA16(3.6,-7.6) AA17(4.4,-7.6) AA18(5.2,-7.6) AA19(6,-7.6) AA20(6.8,-7.6) AA21(7.6,-7.6) AA22(8.4,-7.6) AB1(-8.4,-8.4) AB2(-7.6,-8.4) AB3(-6.8,-8.4) AB4(-6,-8.4) AB5(-5.2,-8.4) AB6(-4.4,-8.4) AB7(-3.6,-8.4) AB8(-2.8,-8.4) AB9(-2,-8.4) AB10(-1.2,-8.4) AB11(-0.4,-8.4) AB12(0.4,-8.4) AB13(1.2,-8.4) AB14(2,-8.4) AB15(2.8,-8.4) AB16(3.6,-8.4) AB17(4.4,-8.4) AB18(5.2,-8.4) AB19(6,-8.4) AB20(6.8,-8.4) AB21(7.6,-8.4) AB22(8.4,-8.4) B1(-8.4,7.6) B2(-7.6,7.6) B3(-6.8,7.6) B4(-6,7.6) B5(-5.2,7.6) B6(-4.4,7.6) B7(-3.6,7.6) B8(-2.8,7.6) B9(-2,7.6) B10(-1.2,7.6) B11(-0.4,7.6) B12(0.4,7.6) B13(1.2,7.6) B14(2,7.6) B15(2.8,7.6) B16(3.6,7.6) B17(4.4,7.6) B18(5.2,7.6) B19(6,7.6) B20(6.8,7.6) B21(7.6,7.6) B22(8.4,7.6) C1(-8.4,6.8) C2(-7.6,6.8) C3(-6.8,6.8) C4(-6,6.8) C5(-5.2,6.8) C6(-4.4,6.8) C7(-3.6,6.8) C8(-2.8,6.8) C9(-2,6.8) C10(-1.2,6.8) C11(-0.4,6.8) C12(0.4,6.8) C13(1.2,6.8) C14(2,6.8) C15(2.8,6.8) C16(3.6,6.8) C17(4.4,6.8) C18(5.2,6.8) C19(6,6.8) C20(6.8,6.8) C21(7.6,6.8) C22(8.4,6.8) D1(-8.4,6) D2(-7.6,6) D3(-6.8,6) D4(-6,6) D5(-5.2,6) D6(-4.4,6) D7(-3.6,6) D8(-2.8,6) D9(-2,6) D10(-1.2,6) D11(-0.4,6) D12(0.4,6) D13(1.2,6) D14(2,6) D15(2.8,6) D16(3.6,6) D17(4.4,6) D18(5.2,6) D19(6,6) D20(6.8,6) D21(7.6,6) D22(8.4,6) E1(-8.4,5.2) E2(-7.6,5.2) E3(-6.8,5.2) E4(-6,5.2) E5(-5.2,5.2) E6(-4.4,5.2) E7(-3.6,5.2) E8(-2.8,5.2) E9(-2,5.2) E10(-1.2,5.2) E11(-0.4,5.2) E12(0.4,5.2) E13(1.2,5.2) E14(2,5.2) E15(2.8,5.2) E16(3.6,5.2) E17(4.4,5.2) E18(5.2,5.2) E19(6,5.2) E20(6.8,5.2) E21(7.6,5.2) E22(8.4,5.2) F1(-8.4,4.4) F2(-7.6,4.4) F3(-6.8,4.4) F4(-6,4.4) F5(-5.2,4.4) F6(-4.4,4.4) F7(-3.6,4.4) F8(-2.8,4.4) F9(-2,4.4) F10(-1.2,4.4) F11(-0.4,4.4) F12(0.4,4.4) F13(1.2,4.4) F14(2,4.4) F15(2.8,4.4) F16(3.6,4.4) F17(4.4,4.4) F18(5.2,4.4) F19(6,4.4) F20(6.8,4.4) F21(7.6,4.4) F22(8.4,4.4) G1(-8.4,3.6) G2(-7.6,3.6) G3(-6.8,3.6) G4(-6,3.6) G5(-5.2,3.6) G6(-4.4,3.6) G7(-3.6,3.6) G8(-2.8,3.6) G9(-2,3.6) G10(-1.2,3.6) G11(-0.4,3.6) G12(0.4,3.6) G13(1.2,3.6) G14(2,3.6) G15(2.8,3.6) G16(3.6,3.6) G17(4.4,3.6) G18(5.2,3.6) G19(6,3.6) G20(6.8,3.6) G21(7.6,3.6) G22(8.4,3.6) H1(-8.4,2.8) H2(-7.6,2.8) H3(-6.8,2.8) H4(-6,2.8) H5(-5.2,2.8) H6(-4.4,2.8) H7(-3.6,2.8) H8(-2.8,2.8) H9(-2,2.8) H10(-1.2,2.8) H11(-0.4,2.8) H12(0.4,2.8) H13(1.2,2.8) H14(2,2.8) H15(2.8,2.8) H16(3.6,2.8) H17(4.4,2.8) H18(5.2,2.8) H19(6,2.8) H20(6.8,2.8) H21(7.6,2.8) H22(8.4,2.8) J1(-8.4,2) J2(-7.6,2) J3(-6.8,2) J4(-6,2) J5(-5.2,2) J6(-4.4,2) J7(-3.6,2) J8(-2.8,2) J9(-2,2) J10(-1.2,2) J11(-0.4,2) J12(0.4,2) J13(1.2,2) J14(2,2) J15(2.8,2) J16(3.6,2) J17(4.4,2) J18(5.2,2) J19(6,2) J20(6.8,2) J21(7.6,2) J22(8.4,2) K1(-8.4,1.2) K2(-7.6,1.2) K3(-6.8,1.2) K4(-6,1.2) K5(-5.2,1.2) K6(-4.4,1.2) K7(-3.6,1.2) K8(-2.8,1.2) K9(-2,1.2) K10(-1.2,1.2) K11(-0.4,1.2) K12(0.4,1.2) K13(1.2,1.2) K14(2,1.2) K15(2.8,1.2) K16(3.6,1.2) K17(4.4,1.2) K18(5.2,1.2) K19(6,1.2) K20(6.8,1.2) K21(7.6,1.2) K22(8.4,1.2) L1(-8.4,0.4) L2(-7.6,0.4) L3(-6.8,0.4) L4(-6,0.4) L5(-5.2,0.4) L6(-4.4,0.4) L7(-3.6,0.4) L8(-2.8,0.4) L9(-2,0.4) L10(-1.2,0.4) L11(-0.4,0.4) L12(0.4,0.4) L13(1.2,0.4) L14(2,0.4) L15(2.8,0.4) L16(3.6,0.4) L17(4.4,0.4) L18(5.2,0.4) L19(6,0.4) L20(6.8,0.4) L21(7.6,0.4) L22(8.4,0.4) M1(-8.4,-0.4) M2(-7.6,-0.4) M3(-6.8,-0.4) M4(-6,-0.4) M5(-5.2,-0.4) M6(-4.4,-0.4) M7(-3.6,-0.4) M8(-2.8,-0.4) M9(-2,-0.4) M10(-1.2,-0.4) M11(-0.4,-0.4) M12(0.4,-0.4) M13(1.2,-0.4) M14(2,-0.4) M15(2.8,-0.4) M16(3.6,-0.4) M17(4.4,-0.4) M18(5.2,-0.4) M19(6,-0.4) M20(6.8,-0.4) M21(7.6,-0.4) M22(8.4,-0.4) N1(-8.4,-1.2) N2(-7.6,-1.2) N3(-6.8,-1.2) N4(-6,-1.2) N5(-5.2,-1.2) N6(-4.4,-1.2) N7(-3.6,-1.2) N8(-2.8,-1.2) N9(-2,-1.2) N10(-1.2,-1.2) N11(-0.4,-1.2) N12(0.4,-1.2) N13(1.2,-1.2) N14(2,-1.2) N15(2.8,-1.2) N16(3.6,-1.2) N17(4.4,-1.2) N18(5.2,-1.2) N19(6,-1.2) N20(6.8,-1.2) N21(7.6,-1.2) N22(8.4,-1.2) P1(-8.4,-2) P2(-7.6,-2) P3(-6.8,-2) P4(-6,-2) P5(-5.2,-2) P6(-4.4,-2) P7(-3.6,-2) P8(-2.8,-2) P9(-2,-2) P10(-1.2,-2) P11(-0.4,-2) P12(0.4,-2) P13(1.2,-2) P14(2,-2) P15(2.8,-2) P16(3.6,-2) P17(4.4,-2) P18(5.2,-2) P19(6,-2) P20(6.8,-2) P21(7.6,-2) P22(8.4,-2) R1(-8.4,-2.8) R2(-7.6,-2.8) R3(-6.8,-2.8) R4(-6,-2.8) R5(-5.2,-2.8) R6(-4.4,-2.8) R7(-3.6,-2.8) R8(-2.8,-2.8) R9(-2,-2.8) R10(-1.2,-2.8) R11(-0.4,-2.8) R12(0.4,-2.8) R13(1.2,-2.8) R14(2,-2.8) R15(2.8,-2.8) R16(3.6,-2.8) R17(4.4,-2.8) R18(5.2,-2.8) R19(6,-2.8) R20(6.8,-2.8) R21(7.6,-2.8) R22(8.4,-2.8) T1(-8.4,-3.6) T2(-7.6,-3.6) T3(-6.8,-3.6) T4(-6,-3.6) T5(-5.2,-3.6) T6(-4.4,-3.6) T7(-3.6,-3.6) T8(-2.8,-3.6) T9(-2,-3.6) T10(-1.2,-3.6) T11(-0.4,-3.6) T12(0.4,-3.6) T13(1.2,-3.6) T14(2,-3.6) T15(2.8,-3.6) T16(3.6,-3.6) T17(4.4,-3.6) T18(5.2,-3.6) T19(6,-3.6) T20(6.8,-3.6) T21(7.6,-3.6) T22(8.4,-3.6) U1(-8.4,-4.4) U2(-7.6,-4.4) U3(-6.8,-4.4) U4(-6,-4.4) U5(-5.2,-4.4) U6(-4.4,-4.4) U7(-3.6,-4.4) U8(-2.8,-4.4) U9(-2,-4.4) U10(-1.2,-4.4) U11(-0.4,-4.4) U12(0.4,-4.4) U13(1.2,-4.4) U14(2,-4.4) U15(2.8,-4.4) U16(3.6,-4.4) U17(4.4,-4.4) U18(5.2,-4.4) U19(6,-4.4) U20(6.8,-4.4) U21(7.6,-4.4) U22(8.4,-4.4) V1(-8.4,-5.2) V2(-7.6,-5.2) V3(-6.8,-5.2) V4(-6,-5.2) V5(-5.2,-5.2) V6(-4.4,-5.2) V7(-3.6,-5.2) V8(-2.8,-5.2) V9(-2,-5.2) V10(-1.2,-5.2) V11(-0.4,-5.2) V12(0.4,-5.2) V13(1.2,-5.2) V14(2,-5.2) V15(2.8,-5.2) V16(3.6,-5.2) V17(4.4,-5.2) V18(5.2,-5.2) V19(6,-5.2) V20(6.8,-5.2) V21(7.6,-5.2) V22(8.4,-5.2) W1(-8.4,-6) W2(-7.6,-6) W3(-6.8,-6) W4(-6,-6) W5(-5.2,-6) W6(-4.4,-6) W7(-3.6,-6) W8(-2.8,-6) W9(-2,-6) W10(-1.2,-6) W11(-0.4,-6) W12(0.4,-6) W13(1.2,-6) W14(2,-6) W15(2.8,-6) W16(3.6,-6) W17(4.4,-6) W18(5.2,-6) W19(6,-6) W20(6.8,-6) W21(7.6,-6) W22(8.4,-6) Y1(-8.4,-6.8) Y2(-7.6,-6.8) Y3(-6.8,-6.8) Y4(-6,-6.8) Y5(-5.2,-6.8) Y6(-4.4,-6.8) Y7(-3.6,-6.8) Y8(-2.8,-6.8) Y9(-2,-6.8) Y10(-1.2,-6.8) Y11(-0.4,-6.8) Y12(0.4,-6.8) Y13(1.2,-6.8) Y14(2,-6.8) Y15(2.8,-6.8) Y16(3.6,-6.8) Y17(4.4,-6.8) Y18(5.2,-6.8) Y19(6,-6.8) Y20(6.8,-6.8) Y21(7.6,-6.8) Y22(8.4,-6.8)
  F.SilkS lines w0.254: -9.754,-6.8 -9.5,-6.8 ; -9.754,-2.8 -9.5,-2.8 ; -9.754,1.2 -9.5,1.2 ; -9.754,5.2 -9.5,5.2 ; -5.2,-9.754 -5.2,-9.5 ; -5.2,9.5 -5.2,9.754 ; -1.2,-9.754 -1.2,-9.5 ; -1.2,9.5 -1.2,9.754 ; 2.8,-9.754 2.8,-9.5 ; 2.8,9.5 2.8,9.754 ; 6.8,-9.754 6.8,-9.5 ; 6.8,9.5 6.8,9.754 ; 9.5,-6.8 9.754,-6.8 ; 9.5,-2.8 9.754,-2.8 ; 9.5,1.2 9.754,1.2 ; 9.5,5.2 9.754,5.2 ; -9.627,-9.627 9.627,-9.627 9.627,9.627 -9.627,9.627 -9.627,-9.627
  Eco2.User region: 9.245,-9.245 -9.245,-9.245 -9.245,9.245 9.245,9.245
  F.CrtYd lines w0.254: -9.754,-9.754 9.754,-9.754 9.754,9.754 -9.754,9.754 -9.754,-9.754
PEC164120FS0012 [mm]
  round 1.95 hole 1.3 paste-2539.97 mask-1.95: A1(0,0) B1(5,0) C1(10,0) D1(2.5,17.5) E1(7.5,17.5)
  round 4.46 hole 2.973 paste-2539.97 mask-4.46: MH1(-2.4,10.5) MH2(12.4,10.5)
  F.SilkS lines w0.254: -3,7.5 -3,-2 13,-2 13,7.5 ; -3,13.5 -3,18.8 13,18.8 13,13.5 ; 0,-2.5 ccw(c0,-2.45) 0,-2.4 ccw(c0,-2.45) 0,-2.5
  F.CrtYd lines w0.254: -5.63,-3 15.63,-3 15.63,19.8 -5.63,19.8 -5.63,-3
QFN50P500X500X100-33N-D [mm]
  rect 0.9x0.3 smd paste-0.9 mask-0.9: 1(-2.45,1.75) 2(-2.45,1.25) 3(-2.45,0.75) 4(-2.45,0.25) 5(-2.45,-0.25) 6(-2.45,-0.75) 7(-2.45,-1.25) 8(-2.45,-1.75) 17(2.45,-1.75) 18(2.45,-1.25) 19(2.45,-0.75) 20(2.45,-0.25) 21(2.45,0.25) 22(2.45,0.75) 23(2.45,1.25) 24(2.45,1.75)
  rect 0.3x0.9 smd paste-0.9 mask-0.9: 9(-1.75,-2.45) 10(-1.25,-2.45) 11(-0.75,-2.45) 12(-0.25,-2.45) 13(0.25,-2.45) 14(0.75,-2.45) 15(1.25,-2.45) 16(1.75,-2.45) 25(1.75,2.45) 26(1.25,2.45) 27(0.75,2.45) 28(0.25,2.45) 29(-0.25,2.45) 30(-0.75,2.45) 31(-1.25,2.45) 32(-1.75,2.45)
  rect 3.45x3.45 smd paste-3.45 mask-3.45: 33(0,0)
  F.SilkS circle w0.254: c-2.9,2.5 r0.125
  F.CrtYd lines w0.254: -3.15,-3.15 3.15,-3.15 3.15,3.15 -3.15,3.15 -3.15,-3.15
SOT-223-3_TabPin2 [mm]
  rrect25% 2x1.5 smd paste-2 mask-2: 1(-3.15,2.3) 2(-3.15,0) 3(-3.15,-2.3)
  rrect25% 2x3.8 smd paste-3.8 mask-3.8: 2(3.15,0)
  F.SilkS region: -3.13,3.31 -3.37,3.64 -2.89,3.64
  F.SilkS lines w0.254: -1.85,-3.41 1.91,-3.41 1.91,-2.15 ; -1.85,3.41 1.91,3.41 1.91,2.15
  F.CrtYd lines w0.254: -4.4,-3.6 4.4,-3.6 4.4,3.6 -4.4,3.6 -4.4,-3.6

## Part data
C2 C3 C8 C9 C15 C16 C19 C20 C24 C25 C30 C31 C33 C34 C36 C37 C38 C40 C44 C45 C50 C51 C52 C53 C62 C63 R5 R6: library part C_0805_2012Metric_Pad1.18x1.45mm_HandSolder, "Capacitor SMD 0805 (2012 Metric), square (rectangular) end terminal, IPC-7351 nominal with elongated pad for handsoldering. (Body size source: IPC-SM-782 page 76, https://www.pcb-3d.com/wordpress/wp-content/uploads/ipc-sm-782a_amendment_1_and_2.pdf, https://docs.google.com/spreadsheets/d/1BsfQQcO9C6DZCsRaXUlFlo91Tg2WpOkGARC1WS5S8t0/edit?usp=sharing)", KiLib_Generator=SMD_2terminal_chip_molded
  C2 C3 C8 C9 C15 C16 C19 C20 C24 C25 C30 C31 C33 C34 C36 C37 C38 C40 C44 C45 C50 C51 C52 C53 C62 C63: Description="Unpolarized capacitor", ki_fp_filters=C_*
  R5 R6: Description=Resistor, ki_fp_filters=R_*
C4 C5 C6 C7 C12 C13 C14 C17 C18 C21 C22 C23 C26 C27 C28 C29 C32 C35 C39 C41 C42 C43 C46 C47 C48 C49 C57 C61: library part C_0402_1005Metric_Pad0.74x0.62mm_HandSolder, "Capacitor SMD 0402 (1005 Metric), square (rectangular) end terminal, IPC-7351 nominal with elongated pad for handsoldering. (Body size source: IPC-SM-782 page 76, https://www.pcb-3d.com/wordpress/wp-content/uploads/ipc-sm-782a_amendment_1_and_2.pdf)", KiLib_Generator=SMD_2terminal_chip_molded, ki_fp_filters=C_*
  C4 C5 C6 C7 C12 C13 C14 C17 C21 C22 C23 C26 C27 C28 C29 C32 C35 C39 C41 C42 C43 C46 C47 C48 C49 C57 C61: Description="Unpolarized capacitor"
  C18: Description="Unpolarized capacitor, must have less tha 5.1mm trace length from cap to Vccpaux and GND BGA Vias"
C10: library part CAPC1608X90N, "GRM18_0.10 L=1.6mm W=0.8mm T=0.8mm", Mouser Part Number=81-GRM188R60G106ME47, Manufacturer_Name="Murata Electronics", Manufacturer_Part_Number=GRM188R60G106ME47D, Datasheet=https://search.murata.co.jp/Ceramy/image/img/A01X/G101/ENG/GRM188R60G106ME47-01ZA.pdf, Description="Murata 0603 GRM 10uF Ceramic Multilayer Capacitor, 4 V dc, +85C, X5R Dielectric, +/-20%", Height=0.9, Mouser Price/Stock=https://www.mouser.co.uk/ProductDetail/Murata-Electronics/GRM188R60G106ME47D?qs=dddcrN876GrkTI%252BtNGmhwA%3D%3D
C11: library part CAPC1005X70N, "GRM15_0.10 L=1.0mm W=0.5mm T=0.5mm", Mouser Part Number=81-GRM155R60J474KE9D, Manufacturer_Name="Murata Electronics", Manufacturer_Part_Number=GRM155R60J474KE19D, Datasheet=https://search.murata.co.jp/Ceramy/image/img/A01X/G101/ENG/GRM155R60J474KE19-01A.pdf, Description="Cap, Ceramic,0402, 470nF 6.3V Murata 0402 GRM 470nF Ceramic Multilayer Capacitor, 6.3 V dc, +85C, X5R Dielectric, +/-10% SMD", Height=0.7, Mouser Price/Stock=https://www.mouser.co.uk/ProductDetail/Murata-Electronics/GRM155R60J474KE19D?qs=5bAuhL3RhmN9%252Bhy3sCalLA%3D%3D
C54 C55 C56 C58 C59 C60: library part C_0402_1005Metric, "Capacitor SMD 0402 (1005 Metric), square (rectangular) end terminal, IPC-7351 nominal, (Body size source: IPC-SM-782 page 76, https://www.pcb-3d.com/wordpress/wp-content/uploads/ipc-sm-782a_amendment_1_and_2.pdf)", Description="Unpolarized capacitor", KiLib_Generator=SMD_2terminal_chip_molded, ki_fp_filters=C_*
FB1: library part BLM18EG101TH1D, "BLM18_2 L=1.6 W=0.8 T=0.5", Mouser Part Number=81-BLM18SG121TN1D, Manufacturer_Name="Murata Electronics", Manufacturer_Part_Number=BLM18SG121TN1D, Datasheet=http://www.murata.com/~/media/webrenewal/support/library/catalog/products/emc/emifil/c31e.ashx?la=en-gb, Description="Ferrite bead SMD 0603 120R 3A Murata Ferrite Bead (Chip Bead), 1.6 x 0.8 x 0.5mm (0603), 120 impedance at 100 MHz", Height=0.75, Mouser Price/Stock=https://www.mouser.co.uk/ProductDetail/Murata-Electronics/BLM18SG121TN1D?qs=OMB6gcCnelWdy%252B7xRA0fBw%3D%3D
IC1 IC2: library part BGA96C80P9X16_750X1300X100, "96 ball BGA-1", Mouser Part Number=473-M4G3C618BGIEAT, Manufacturer_Name=SMARTsemi, Manufacturer_Part_Number=KTDM4G3C618BGIEAT, Datasheet=https://smartsemi.staging.multicomma.com/wp-content/uploads/2022/07/SMARTsemi_DS_KTDM4G3C618BGxEAT_rev1.0.pdf, Description="4Gb DDR3 SDRAM 256Mbx16 96-FBGA Industrial Temp", Height=1, Mouser Price/Stock=https://www.mouser.co.uk/ProductDetail/SMARTsemi/KTDM4G3C618BGIEAT?qs=By6Nw2ByBD1H5%252BQ37Z8mNQ%3D%3D
IC3: library part QFN50P500X500X100-33N-D, "32-LEAD QFN-ren1", Mouser Part Number=886-USB3320C-EZK, Manufacturer_Name=Microchip, Manufacturer_Part_Number=USB3320C-EZK, Datasheet=https://componentsearchengine.com/Datasheets/2/USB3320C-EZK.pdf, Description="USB Interface IC Hi-Speed USB 2.0 ESD +30V Vbus", Height=1, Mouser Price/Stock=https://www.mouser.co.uk/ProductDetail/Microchip-Technology/USB3320C-EZK?qs=pA5MXup5wxEV58aAJyVneA%3D%3D
J1: library part 5033981892, "503398-1892", Mouser Part Number=538-503398-1892, Manufacturer_Name=Molex, Datasheet=http://www.molex.com/webdocs/datasheets/pdf/en-us//5033981892_MEMORY_CARD_SOCKET.pdf, Description="MicroSD SMT Push-Push 1.28mm height MicroSD SMT Push-Push 1.28mm height", Height=1.28, Mouser Price/Stock=https://www.mouser.co.uk/ProductDetail/Molex/503398-1892?qs=b0v8CoHHvSMxV%252BW12iKaSg%3D%3D, Manufacturer_Part_Number=503398-1892
U1: library part CLG485_XIL, Datasheet=XC7Z015-2CLG485I, ki_fp_filters="CLG485_XIL CLG485_XIL-M CLG485_XIL-L"
U2: library part AQFN261_11P5X11P5_LIM, Datasheet=LMS7002M, ki_fp_filters=AQFN261_11P5X11P5_LIM
U3: library part PEC164120FS0012, "PEC16-4120F-S0012-1", Mouser Part Number=652-PEC16-4220FS0024, Manufacturer_Name=Bourns, Manufacturer_Part_Number=PEC16-4220F-S0024, Datasheet=https://www.bourns.com/pdfs/PEC16.pdf, Description="Bourns Encoder 24ppr ppr 5 V dc", Height=28, Mouser Price/Stock=https://www.mouser.co.uk/ProductDetail/Bourns/PEC16-4220F-S0024?qs=6FD5PBp7ZtQte%252Bg7b%2FiMUw%3D%3D
U4 U5 U6 U7: library part SOT-223-3_TabPin2, "module CMS SOT223 4 pins", Datasheet=http://www.advanced-monolithic.com/pdf/ds1117.pdf, Description="1A Low Dropout regulator, positive, 1.8V fixed output, SOT-223", ki_fp_filters=SOT?223*TabPin2*

## Nets (pads, with @x,y where several pads share a name; then routed paths per layer and width w, separated by ;. In a path a pad name is that pad's centre, name@x,y a point inside that pad or via, vN(x,y) a via of type N, cw(c..) or ccw(c..) an arc to the next point about the centre after c; other vN are vias at no path point)
pads on no net: C2.1 C2.2 C3.1 C3.2 C4.1 C4.2 C5.1 C5.2 C6.1 C6.2 C7.1 C7.2 C8.1 C8.2 C9.1 C9.2 C10.1 C10.2 C11.1 C11.2 C12.1 C12.2 C13.1 C13.2 C14.1 C14.2 C15.1 C15.2 C16.1 C16.2 C17.1 C17.2 C18.1 C18.2 C19.1 C19.2 C20.1 C20.2 C21.1 C21.2 C22.1 C22.2 C23.1 C23.2 C24.1 C24.2 C25.1 C25.2 C26.1 C26.2 C27.1 C27.2 C28.1 C28.2 C29.1 C29.2 C30.1 C30.2 C31.1 C31.2 C32.1 C32.2 C33.1 C33.2 C34.1 C34.2 C35.1 C35.2 C36.1 C36.2 C37.1 C37.2 C38.1 C38.2 C39.1 C39.2 C40.1 C40.2 C41.1 C41.2 C42.1 C42.2 C43.1 C43.2 C44.1 C44.2 C45.1 C45.2 C46.1 C46.2 C47.1 C47.2 C48.1 C48.2 C49.1 C49.2 C50.1 C50.2 C51.1 C51.2 C52.1 C52.2 C53.1 C53.2 C54.1 C54.2 C55.1 C55.2 C56.1 C56.2 C57.1 C57.2 C58.1 C58.2 C59.1 C59.2 C60.1 C60.2 C61.1 C61.2 C62.1 C62.2 C63.1 C63.2 FB1.1 FB1.2 IC1.A1 IC1.A2 IC1.A3 IC1.A7 IC1.A8 IC1.A9 IC1.B1 IC1.B2 IC1.B3 IC1.B7 IC1.B8 IC1.B9 IC1.C1 IC1.C2 IC1.C3 IC1.C7 IC1.C8 IC1.C9 IC1.D1 IC1.D2 IC1.D3 IC1.D7 IC1.D8 IC1.D9 IC1.E1 IC1.E2 IC1.E3 IC1.E7 IC1.E8 IC1.E9 IC1.F1 IC1.F2 IC1.F3 IC1.F7 IC1.F8 IC1.F9 IC1.G1 IC1.G2 IC1.G3 IC1.G7 IC1.G8 IC1.G9 IC1.H1 IC1.H2 IC1.H3 IC1.H7 IC1.H8 IC1.H9 IC1.J1 IC1.J2 IC1.J3 IC1.J7 IC1.J8 IC1.J9 IC1.K1 IC1.K2 IC1.K3 IC1.K7 IC1.K8 IC1.K9 IC1.L1 IC1.L2 IC1.L3 IC1.L7 IC1.L8 IC1.L9 IC1.M1 IC1.M2 IC1.M3 IC1.M7 IC1.M8 IC1.M9 IC1.N1 IC1.N2 IC1.N3 IC1.N7 IC1.N8 IC1.N9 IC1.P1 IC1.P2 IC1.P3 IC1.P7 IC1.P8 IC1.P9 IC1.R1 IC1.R2 IC1.R3 IC1.R7 IC1.R8 IC1.R9 IC1.T1 IC1.T2 IC1.T3 IC1.T7 IC1.T8 IC1.T9 IC2.A1 IC2.A2 IC2.A3 IC2.A7 IC2.A8 IC2.A9 IC2.B1 IC2.B2 IC2.B3 IC2.B7 IC2.B8 IC2.B9 IC2.C1 IC2.C2 IC2.C3 IC2.C7 IC2.C8 IC2.C9 IC2.D1 IC2.D2 IC2.D3 IC2.D7 IC2.D8 IC2.D9 IC2.E1 IC2.E2 IC2.E3 IC2.E7 IC2.E8 IC2.E9 IC2.F1 IC2.F2 IC2.F3 IC2.F7 IC2.F8 IC2.F9 IC2.G1 IC2.G2 IC2.G3 IC2.G7 IC2.G8 IC2.G9 IC2.H1 IC2.H2 IC2.H3 IC2.H7 IC2.H8 IC2.H9 IC2.J1 IC2.J2 IC2.J3 IC2.J7 IC2.J8 IC2.J9 IC2.K1 IC2.K2 IC2.K3 IC2.K7 IC2.K8 IC2.K9 IC2.L1 IC2.L2 IC2.L3 IC2.L7 IC2.L8 IC2.L9 IC2.M1 IC2.M2 IC2.M3 IC2.M7 IC2.M8 IC2.M9 IC2.N1 IC2.N2 IC2.N3 IC2.N7 IC2.N8 IC2.N9 IC2.P1 IC2.P2 IC2.P3 IC2.P7 IC2.P8 IC2.P9 IC2.R1 IC2.R2 IC2.R3 IC2.R7 IC2.R8 IC2.R9 IC2.T1 IC2.T2 IC2.T3 IC2.T7 IC2.T8 IC2.T9 IC3.1 IC3.2 IC3.3 IC3.4 IC3.5 IC3.6 IC3.7 IC3.8 IC3.9 IC3.10 IC3.11 IC3.12 IC3.13 IC3.14 IC3.15 IC3.16 IC3.17 IC3.18 IC3.19 IC3.20 IC3.21 IC3.22 IC3.23 IC3.24 IC3.25 IC3.26 IC3.27 IC3.28 IC3.29 IC3.30 IC3.31 IC3.32 IC3.33 J1.1 J1.2 J1.3 J1.4 J1.5 J1.6 J1.7 J1.8 J1.9 J1.10 J1.11 J1.12 J1.13 J1.14 R5.1 R5.2 R6.1 R6.2 U1.A1 U1.A2 U1.A3 U1.A4 U1.A5 U1.A6 U1.A7 U1.A8 U1.A9 U1.A10 U1.A11 U1.A12 U1.A13 U1.A14 U1.A15 U1.A16 U1.A17 U1.A18 U1.A19 U1.A20 U1.A21 U1.A22 U1.AA1 U1.AA2 U1.AA3 U1.AA4 U1.AA5 U1.AA6 U1.AA7 U1.AA8 U1.AA9 U1.AA10 U1.AA11 U1.AA12 U1.AA13 U1.AA14 U1.AA15 U1.AA16 U1.AA17 U1.AA18 U1.AA19 U1.AA20 U1.AA21 U1.AA22 U1.AB1 U1.AB2 U1.AB3 U1.AB4 U1.AB5 U1.AB6 U1.AB7 U1.AB8 U1.AB9 U1.AB10 U1.AB11 U1.AB12 U1.AB13 U1.AB14 U1.AB15 U1.AB16 U1.AB17 U1.AB18 U1.AB19 U1.AB20 U1.AB21 U1.AB22 U1.B1 U1.B2 U1.B3 U1.B4 U1.B5 U1.B6 U1.B7 U1.B8 U1.B9 U1.B10 U1.B11 U1.B12 U1.B13 U1.B14 U1.B15 U1.B16 U1.B17 U1.B18 U1.B19 U1.B20 U1.B21 U1.B22 U1.C1 U1.C2 U1.C3 U1.C4 U1.C5 U1.C6 U1.C7 U1.C8 U1.C9 U1.C10 U1.C11 U1.C12 U1.C13 U1.C14 U1.C15 U1.C16 U1.C17 U1.C18 U1.C19 U1.C20 U1.C21 U1.C22 U1.D1 U1.D2 U1.D3 U1.D4 U1.D5 U1.D6 U1.D7 U1.D8 U1.D9 U1.D10 U1.D11 U1.D12 U1.D13 U1.D14 U1.D15 U1.D16 U1.D17 U1.D18 U1.D19 U1.D20 U1.D21 U1.D22 U1.E1 U1.E2 U1.E3 U1.E4 U1.E5 U1.E6 U1.E7 U1.E8 U1.E9 U1.E10 U1.E11 U1.E12 U1.E13 U1.E14 U1.E15 U1.E16 U1.E17 U1.E18 U1.E19 U1.E20 U1.E21 U1.E22 U1.F1 U1.F2 U1.F3 U1.F4 U1.F5 U1.F6 U1.F7 U1.F8 U1.F9 U1.F10 U1.F11 U1.F12 U1.F13 U1.F14 U1.F15 U1.F16 U1.F17 U1.F18 U1.F19 U1.F20 U1.F21 U1.F22 U1.G1 U1.G2 U1.G3 U1.G4 U1.G5 U1.G6 U1.G7 U1.G8 U1.G9 U1.G10 U1.G11 U1.G12 U1.G13 U1.G14 U1.G15 U1.G16 U1.G17 U1.G18 U1.G19 U1.G20 U1.G21 U1.G22 U1.H1 U1.H2 U1.H3 U1.H4 U1.H5 U1.H6 U1.H7 U1.H8 U1.H9 U1.H10 U1.H11 U1.H12 U1.H13 U1.H14 U1.H15 U1.H16 U1.H17 U1.H18 U1.H19 U1.H20 U1.H21 U1.H22 U1.J1 U1.J2 U1.J3 U1.J4 U1.J5 U1.J6 U1.J7 U1.J8 U1.J9 U1.J10 U1.J11 U1.J12 U1.J13 U1.J14 U1.J15 U1.J16 U1.J17 U1.J18 U1.J19 U1.J20 U1.J21 U1.J22 U1.K1 U1.K2 U1.K3 U1.K4 U1.K5 U1.K6 U1.K7 U1.K8 U1.K9 U1.K10 U1.K11 U1.K12 U1.K13 U1.K14 U1.K15 U1.K16 U1.K17 U1.K18 U1.K19 U1.K20 U1.K21 U1.K22 U1.L1 U1.L2 U1.L3 U1.L4 U1.L5 U1.L6 U1.L7 U1.L8 U1.L9 U1.L10 U1.L11 U1.L12 U1.L13 U1.L14 U1.L15 U1.L16 U1.L17 U1.L18 U1.L19 U1.L20 U1.L21 U1.L22 U1.M1 U1.M2 U1.M3 U1.M4 U1.M5 U1.M6 U1.M7 U1.M8 U1.M9 U1.M10 U1.M11 U1.M12 U1.M13 U1.M14 U1.M15 U1.M16 U1.M17 U1.M18 U1.M19 U1.M20 U1.M21 U1.M22 U1.N1 U1.N2 U1.N3 U1.N4 U1.N5 U1.N6 U1.N7 U1.N8 U1.N9 U1.N10 U1.N11 U1.N12 U1.N13 U1.N14 U1.N15 U1.N16 U1.N17 U1.N18 U1.N19 U1.N20 U1.N21 U1.N22 U1.P1 U1.P2 U1.P3 U1.P4 U1.P5 U1.P6 U1.P7 U1.P8 U1.P9 U1.P10 U1.P11 U1.P12 U1.P13 U1.P14 U1.P15 U1.P16 U1.P17 U1.P18 U1.P19 U1.P20 U1.P21 U1.P22 U1.R1 U1.R2 U1.R3 U1.R4 U1.R5 U1.R6 U1.R7 U1.R8 U1.R9 U1.R10 U1.R11 U1.R12 U1.R13 U1.R14 U1.R15 U1.R16 U1.R17 U1.R18 U1.R19 U1.R20 U1.R21 U1.R22 U1.T1 U1.T2 U1.T3 U1.T4 U1.T5 U1.T6 U1.T7 U1.T8 U1.T9 U1.T10 U1.T11 U1.T12 U1.T13 U1.T14 U1.T15 U1.T16 U1.T17 U1.T18 U1.T19 U1.T20 U1.T21 U1.T22 U1.U1 U1.U2 U1.U3 U1.U4 U1.U5 U1.U6 U1.U7 U1.U8 U1.U9 U1.U10 U1.U11 U1.U12 U1.U13 U1.U14 U1.U15 U1.U16 U1.U17 U1.U18 U1.U19 U1.U20 U1.U21 U1.U22 U1.V1 U1.V2 U1.V3 U1.V4 U1.V5 U1.V6 U1.V7 U1.V8 U1.V9 U1.V10 U1.V11 U1.V12 U1.V13 U1.V14 U1.V15 U1.V16 U1.V17 U1.V18 U1.V19 U1.V20 U1.V21 U1.V22 U1.W1 U1.W2 U1.W3 U1.W4 U1.W5 U1.W6 U1.W7 U1.W8 U1.W9 U1.W10 U1.W11 U1.W12 U1.W13 U1.W14 U1.W15 U1.W16 U1.W17 U1.W18 U1.W19 U1.W20 U1.W21 U1.W22 U1.Y1 U1.Y2 U1.Y3 U1.Y4 U1.Y5 U1.Y6 U1.Y7 U1.Y8 U1.Y9 U1.Y10 U1.Y11 U1.Y12 U1.Y13 U1.Y14 U1.Y15 U1.Y16 U1.Y17 U1.Y18 U1.Y19 U1.Y20 U1.Y21 U1.Y22 U2.262 U2.A5 U2.A7 U2.A9 U2.A13 U2.A17 U2.A21 U2.AA1 U2.AA3 U2.AA5 U2.AA29 U2.AA31 U2.AA33 U2.AB2 U2.AB4 U2.AB6 U2.AB30 U2.AB32 U2.AB34 U2.AC3 U2.AC5 U2.AC29 U2.AC31 U2.AC33 U2.AD2 U2.AD4 U2.AD6 U2.AD30 U2.AD32 U2.AE1 U2.AE3 U2.AE5 U2.AE29 U2.AE31 U2.AE33 U2.AF2 U2.AF4 U2.AF6 U2.AF30 U2.AF32 U2.AF34 U2.AG3 U2.AG5 U2.AG29 U2.AG31 U2.AG33 U2.AH2 U2.AH4 U2.AH30 U2.AH32 U2.AJ1 U2.AJ3 U2.AJ5 U2.AJ7 U2.AJ9 U2.AJ11 U2.AJ13 U2.AJ15 U2.AJ19 U2.AJ21 U2.AJ25 U2.AJ27 U2.AJ29 U2.AJ31 U2.AJ33 U2.AK2 U2.AK4 U2.AK6 U2.AK8 U2.AK10 U2.AK12 U2.AK14 U2.AK20 U2.AK22 U2.AK26 U2.AK28 U2.AK30 U2.AK32 U2.AK34 U2.AL3 U2.AL5 U2.AL7 U2.AL9 U2.AL11 U2.AL13 U2.AL19 U2.AL21 U2.AL23 U2.AL27 U2.AL29 U2.AL31 U2.AL33 U2.AM2 U2.AM4 U2.AM6 U2.AM8 U2.AM10 U2.AM12 U2.AM18 U2.AM20 U2.AM22 U2.AM24 U2.AM26 U2.AM28 U2.AM30 U2.AM34 U2.AN3 U2.AN5 U2.AN7 U2.AN9 U2.AN11 U2.AN17 U2.AN23 U2.AN25 U2.AN27 U2.AN29 U2.AN31 U2.AP6 U2.AP10 U2.AP26 U2.AP30 U2.AP32 U2.B2 U2.B4 U2.B8 U2.B10 U2.B12 U2.B14 U2.B16 U2.B18 U2.B20 U2.B22 U2.C1 U2.C3 U2.C5 U2.C7 U2.C9 U2.C11 U2.C13 U2.C15 U2.C17 U2.C19 U2.C21 U2.C23 U2.C25 U2.C27 U2.C29 U2.C31 U2.D2 U2.D4 U2.D6 U2.D8 U2.D10 U2.D12 U2.D14 U2.D16 U2.D18 U2.D20 U2.D22 U2.D24 U2.D26 U2.D28 U2.D30 U2.D32 U2.E3 U2.E5 U2.E9 U2.E11 U2.E13 U2.E15 U2.E17 U2.E19 U2.E21 U2.E23 U2.E25 U2.E27 U2.E29 U2.E31 U2.F2 U2.F4 U2.F6 U2.F8 U2.F10 U2.F12 U2.F14 U2.F16 U2.F18 U2.F20 U2.F22 U2.F24 U2.F26 U2.F28 U2.F30 U2.F32 U2.G1 U2.G3 U2.G5 U2.G29 U2.G31 U2.H2 U2.H6 U2.H30 U2.H32 U2.J1 U2.J3 U2.J5 U2.J31 U2.J33 U2.K2 U2.K4 U2.K6 U2.K30 U2.K32 U2.K34 U2.L3 U2.L5 U2.L31 U2.L33 U2.M2 U2.M4 U2.M6 U2.M30 U2.M32 U2.N1 U2.N3 U2.N31 U2.N33 U2.P2 U2.P4 U2.P30 U2.P32 U2.P34 U2.R3 U2.R5 U2.R29 U2.R31 U2.R33 U2.T4 U2.T6 U2.T30 U2.T32 U2.U1 U2.U3 U2.U5 U2.U29 U2.U31 U2.U33 U2.V2 U2.V4 U2.V6 U2.V30 U2.V32 U2.V34 U2.W3 U2.W29 U2.W31 U2.W33 U2.Y2 U2.Y4 U2.Y6 U2.Y30 U2.Y32 U3.A1 U3.B1 U3.C1 U3.D1 U3.E1 U3.MH1 U3.MH2 U4.1 U4.2 U4.3 U5.1 U5.2 U5.3 U6.1 U6.2 U6.3 U7.1 U7.2 U7.3
copper on no net: | length 400
  Edge.Cuts w0.254: 52.574,26.156 152.574,26.156 152.574,126.156 52.574,126.156 52.574,26.156

## Text inside footprints (layer, text, board x,y; h text height)
U1: F.Fab "22" at 96.304,121.824 h1 r90; F.Fab "1" at 79.501,122.055 h1 r90; F.Fab "AB" at 77.2,103.277 h1; F.Fab "A" at 77.348,120.077 h1; F.SilkS "22" at 96.304,121.824 h1 r90; F.SilkS "1" at 79.501,122.055 h1 r90; F.SilkS "AB" at 77.2,103.277 h1; F.SilkS "A" at 77.348,120.077 h1; B.SilkS "22" at 96.304,121.824 h1 r90; B.SilkS "1" at 79.501,122.055 h1 r90; B.SilkS "AB" at 77.2,103.277 h1; B.SilkS "A" at 77.348,120.077 h1
U2: F.Fab "34" at 91.04,48.599 h1 r90; F.Fab "1" at 80.043,48.83 h1 r90; F.Fab "AP" at 78.582,36.704 h1; F.Fab "A" at 78.731,47.693 h1; F.SilkS "34" at 91.04,48.599 h1 r90; F.SilkS "1" at 80.043,48.83 h1 r90; F.SilkS "AP" at 78.582,36.704 h1; F.SilkS "A" at 78.731,47.693 h1; B.SilkS "34" at 91.04,48.599 h1 r90; B.SilkS "1" at 80.043,48.83 h1 r90; B.SilkS "AP" at 78.582,36.704 h1; B.SilkS "A" at 78.731,47.693 h1